# Altium PCB Export_PCB.PcbDoc (part 1 of 7)
Units mm, origin at the board's own origin, x right, y up, seen from the top; angles counter-clockwise.
Board outline 93 x 90 mm, 6 copper layers (Top_1, GND_2, SIGNAL_3, PWR_4, GND_5, Bottom_6), stack 1.606 mm thick; 470 components, 374 nets, 2145 pads, 1031 vias.
Unrouted connection lines stored in the file: 451.
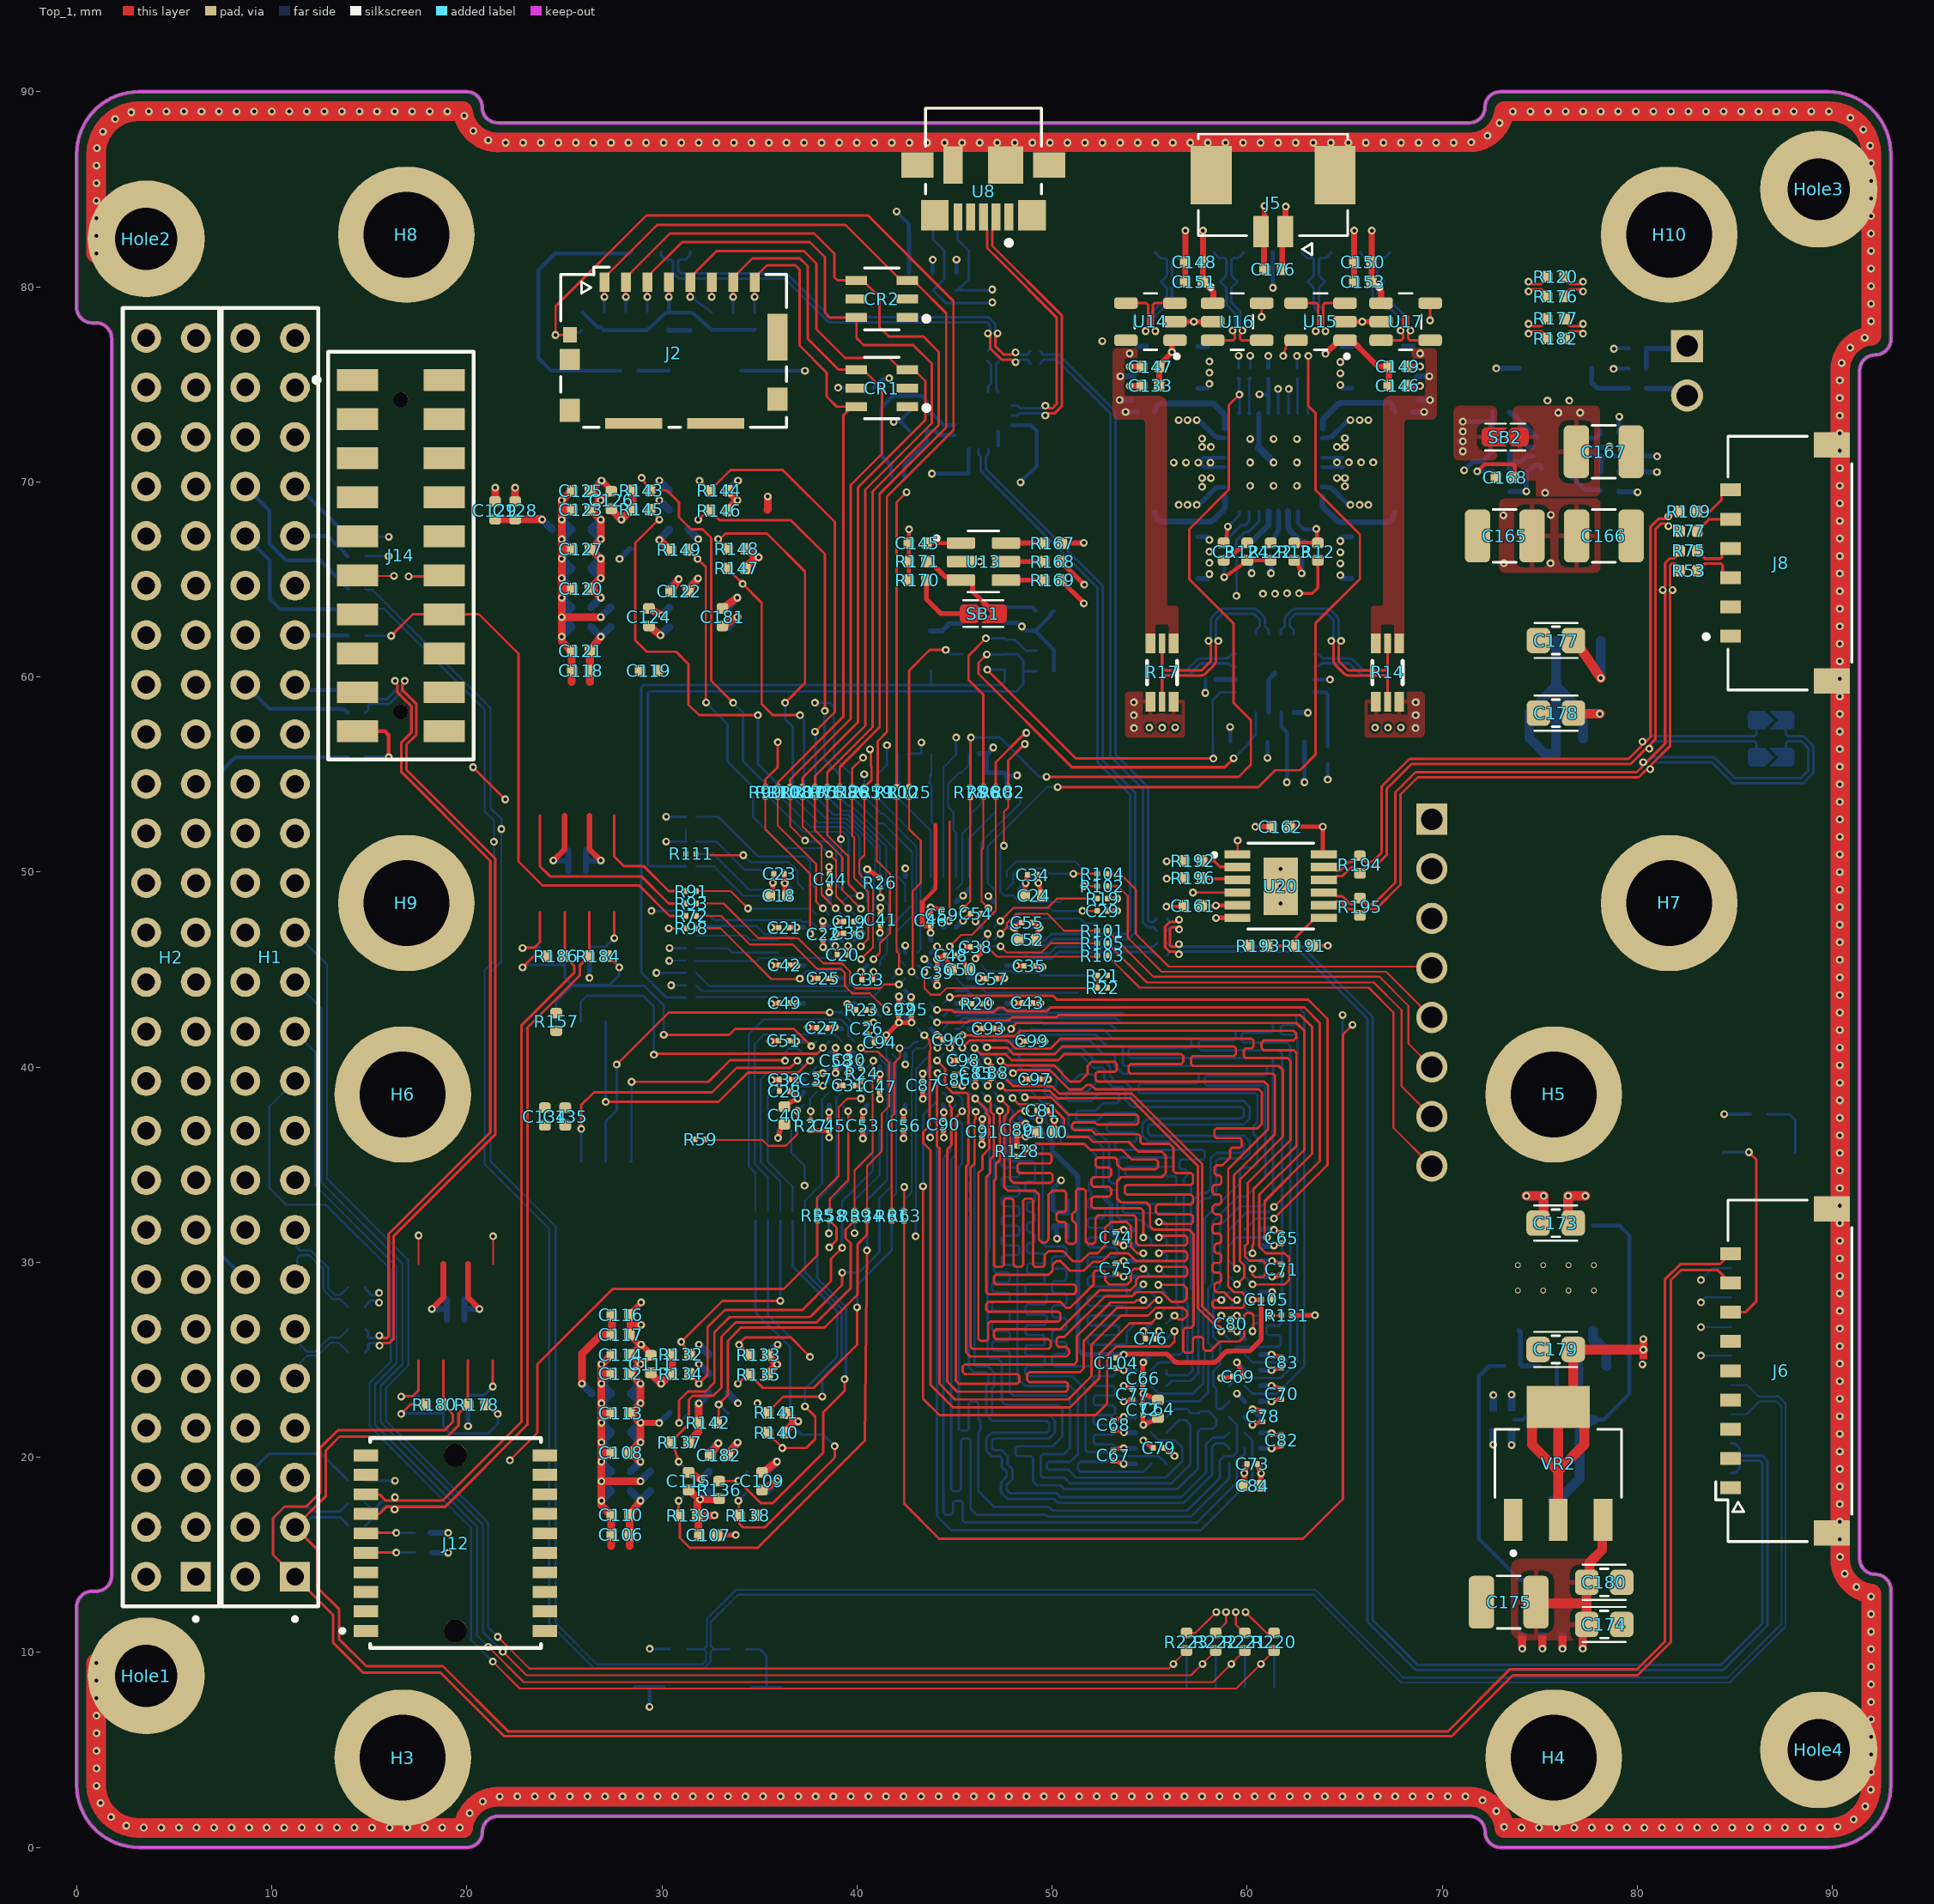
[diagram p0: Top_1 view]
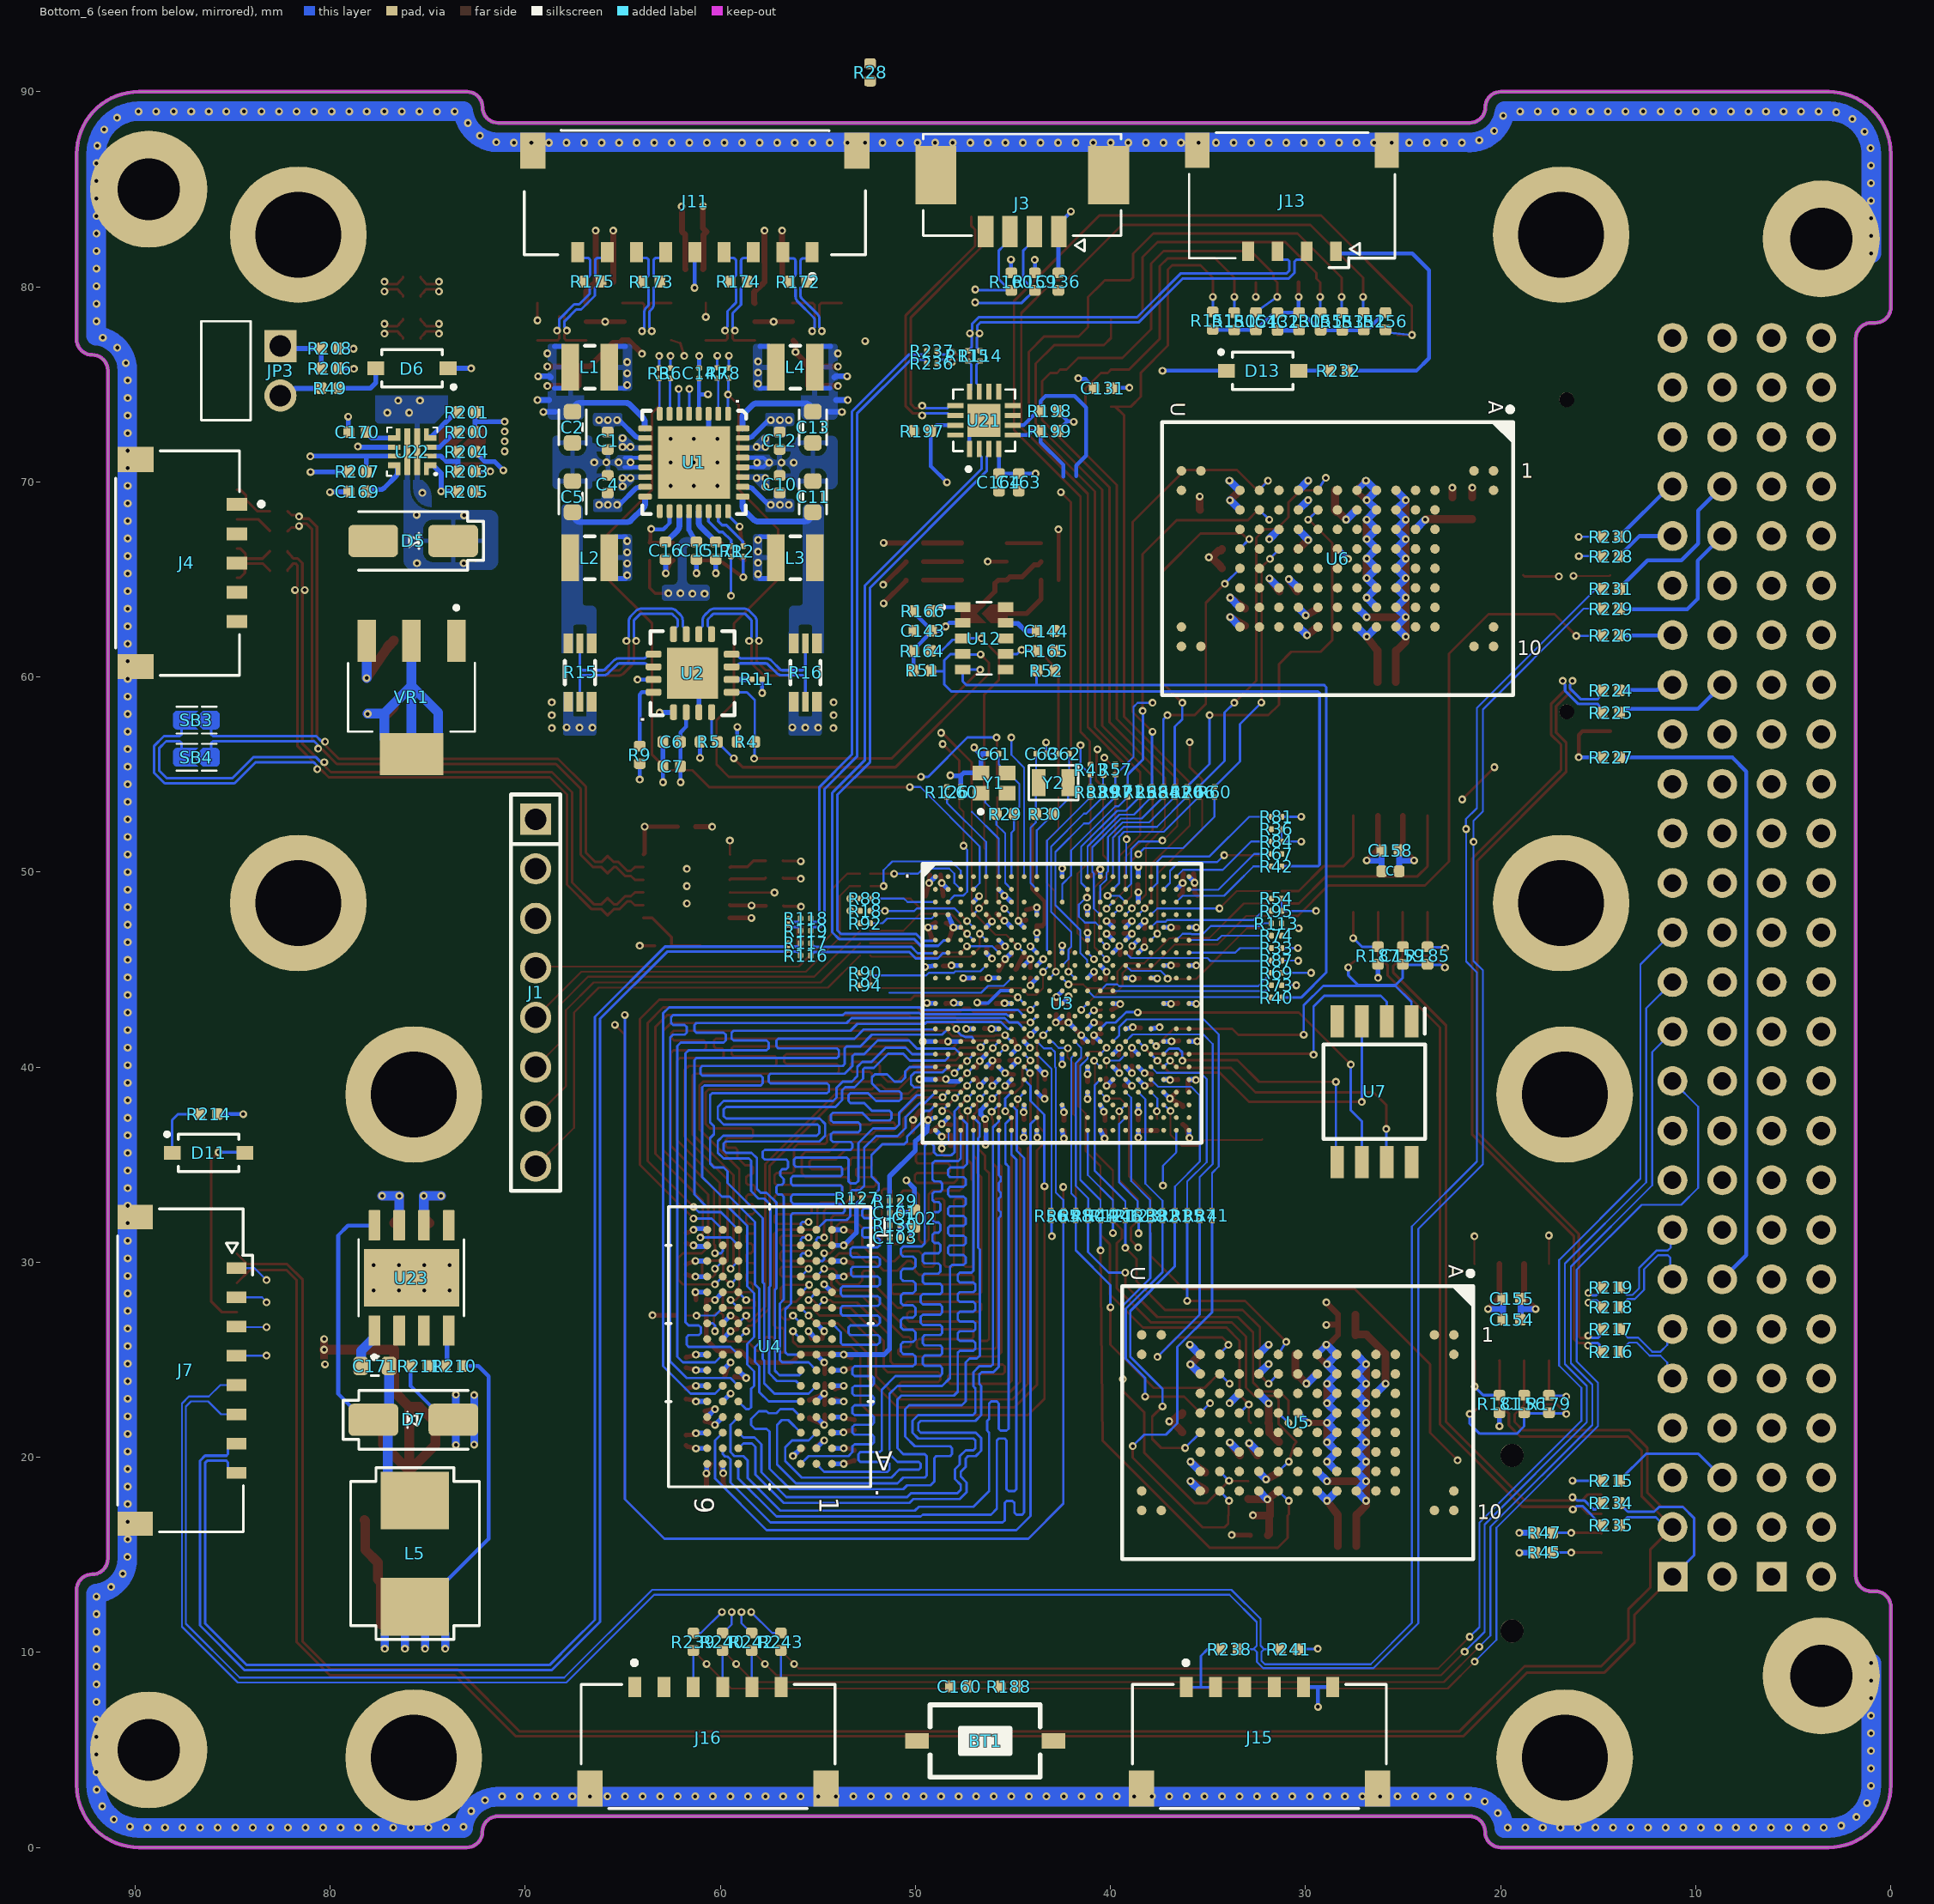
[diagram p1: Bottom_6 view, seen from below]
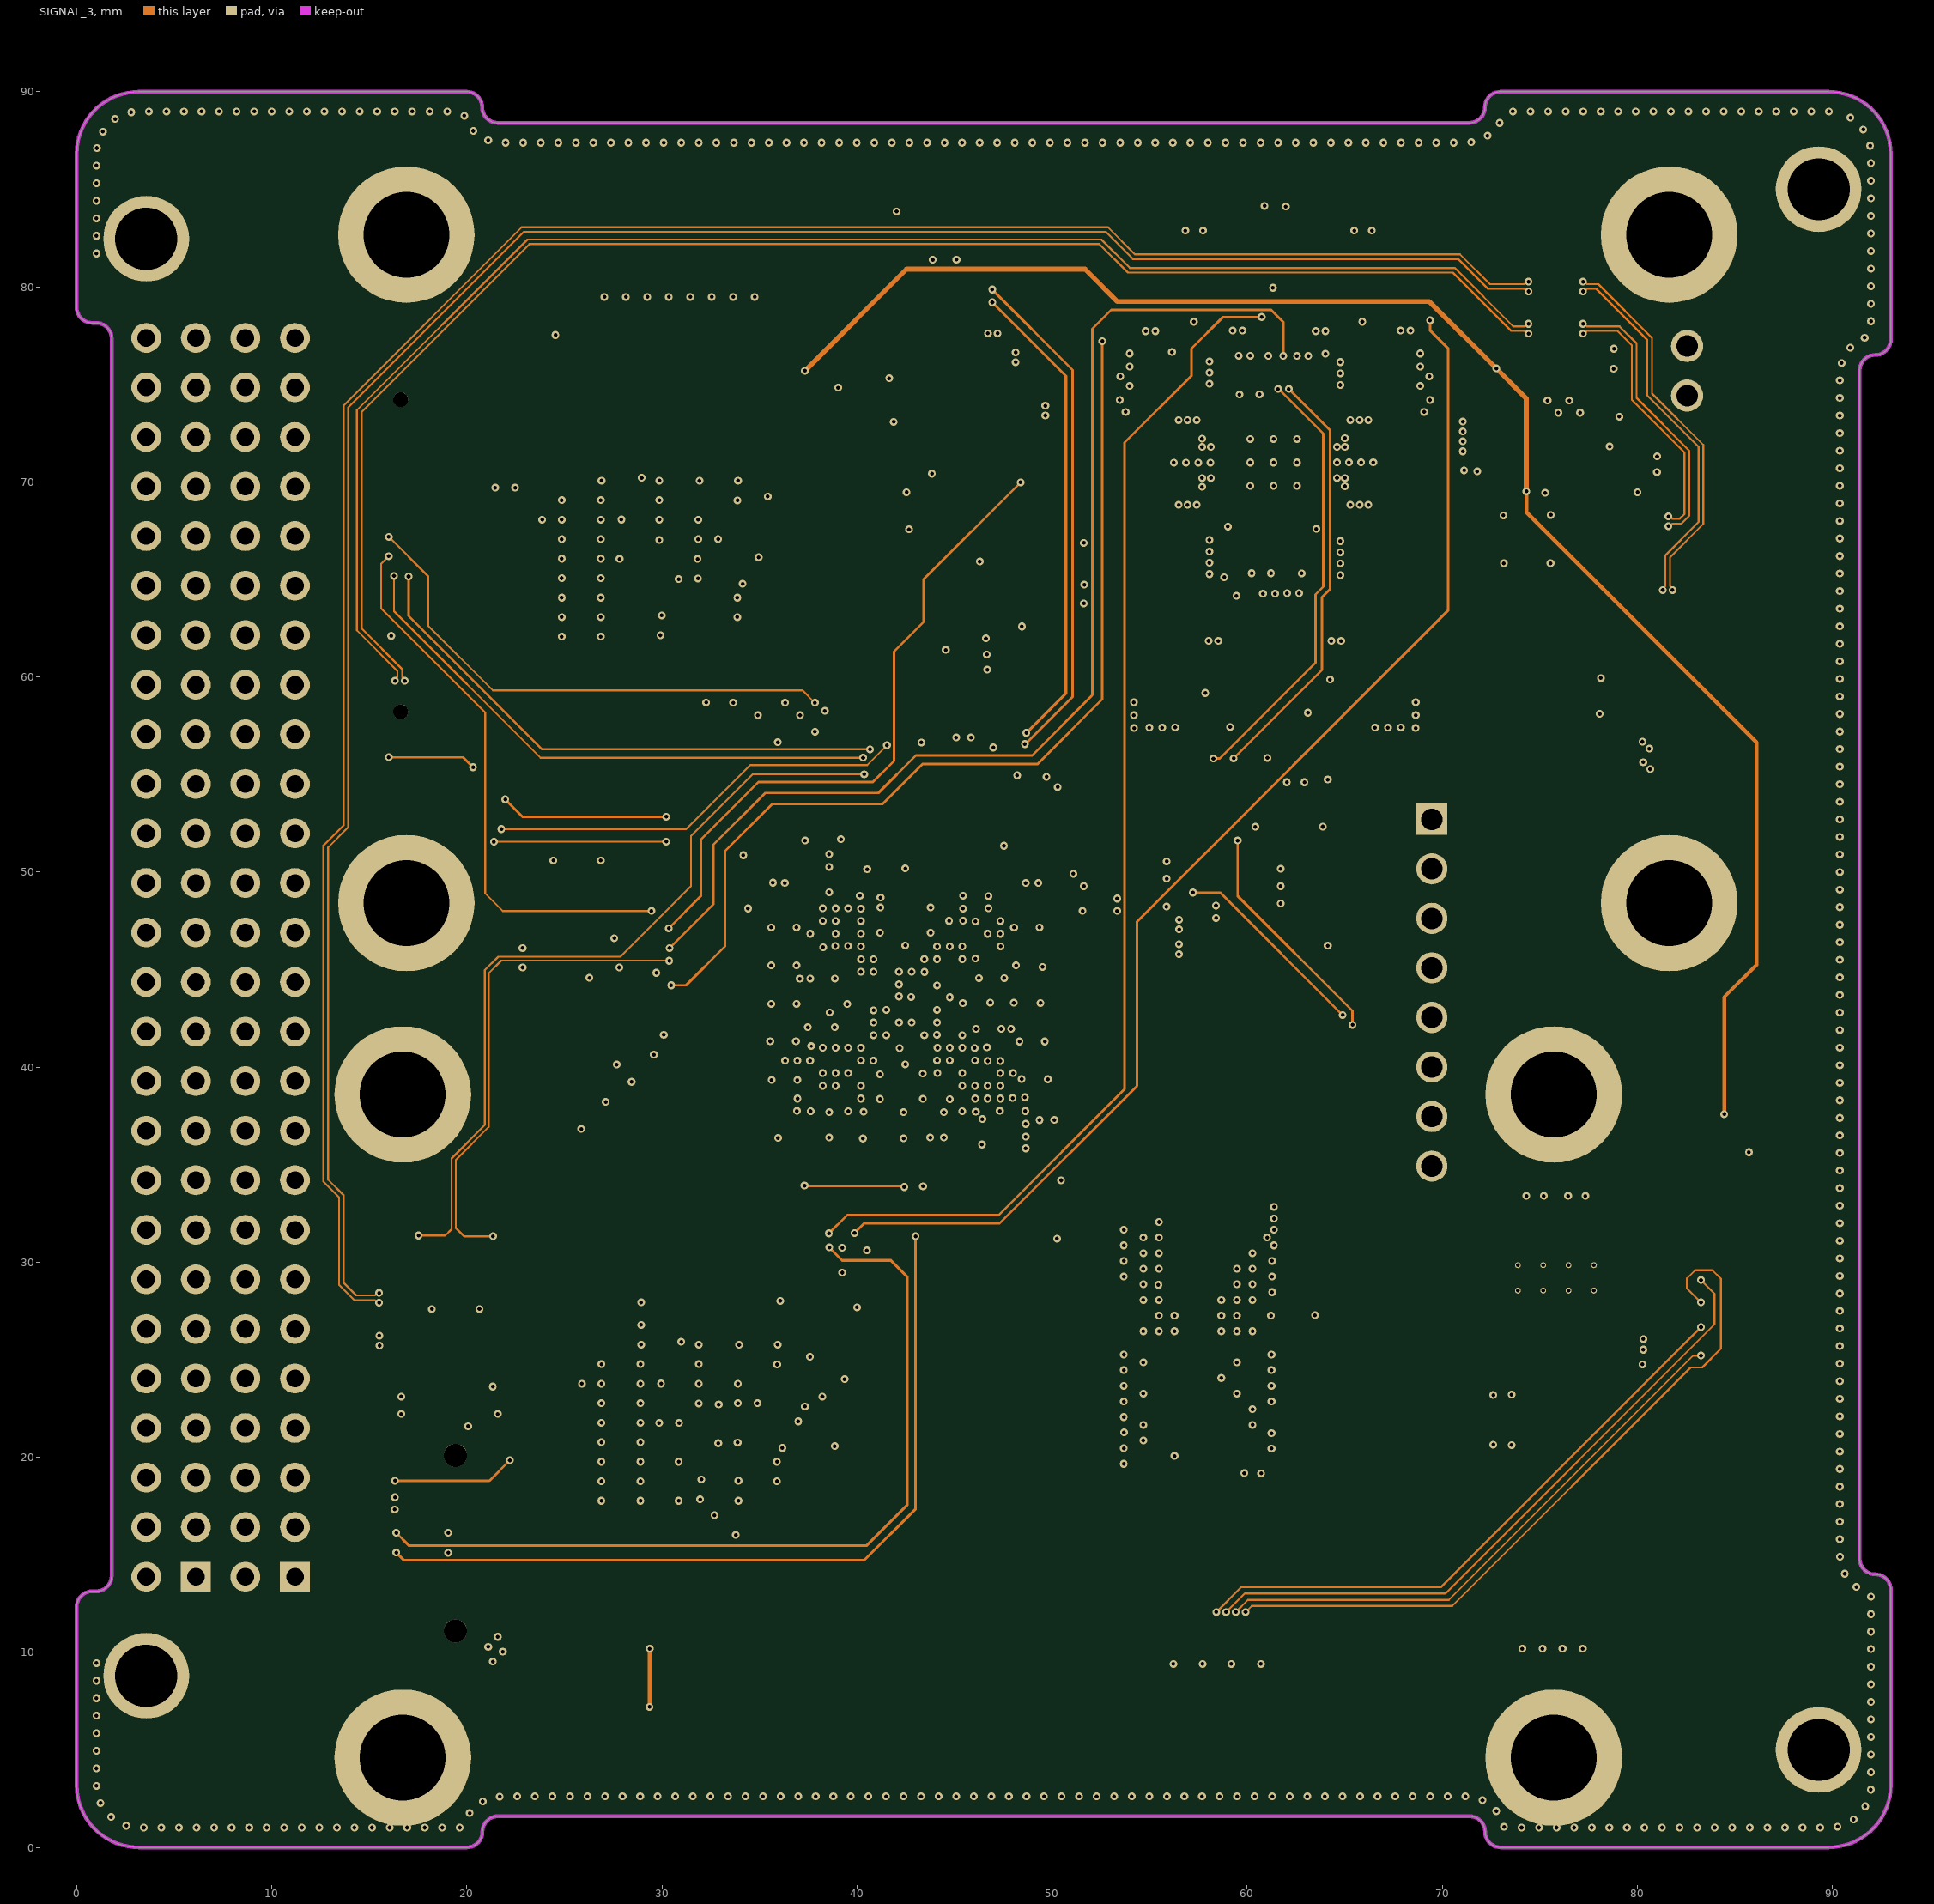
[diagram p2: SIGNAL_3]
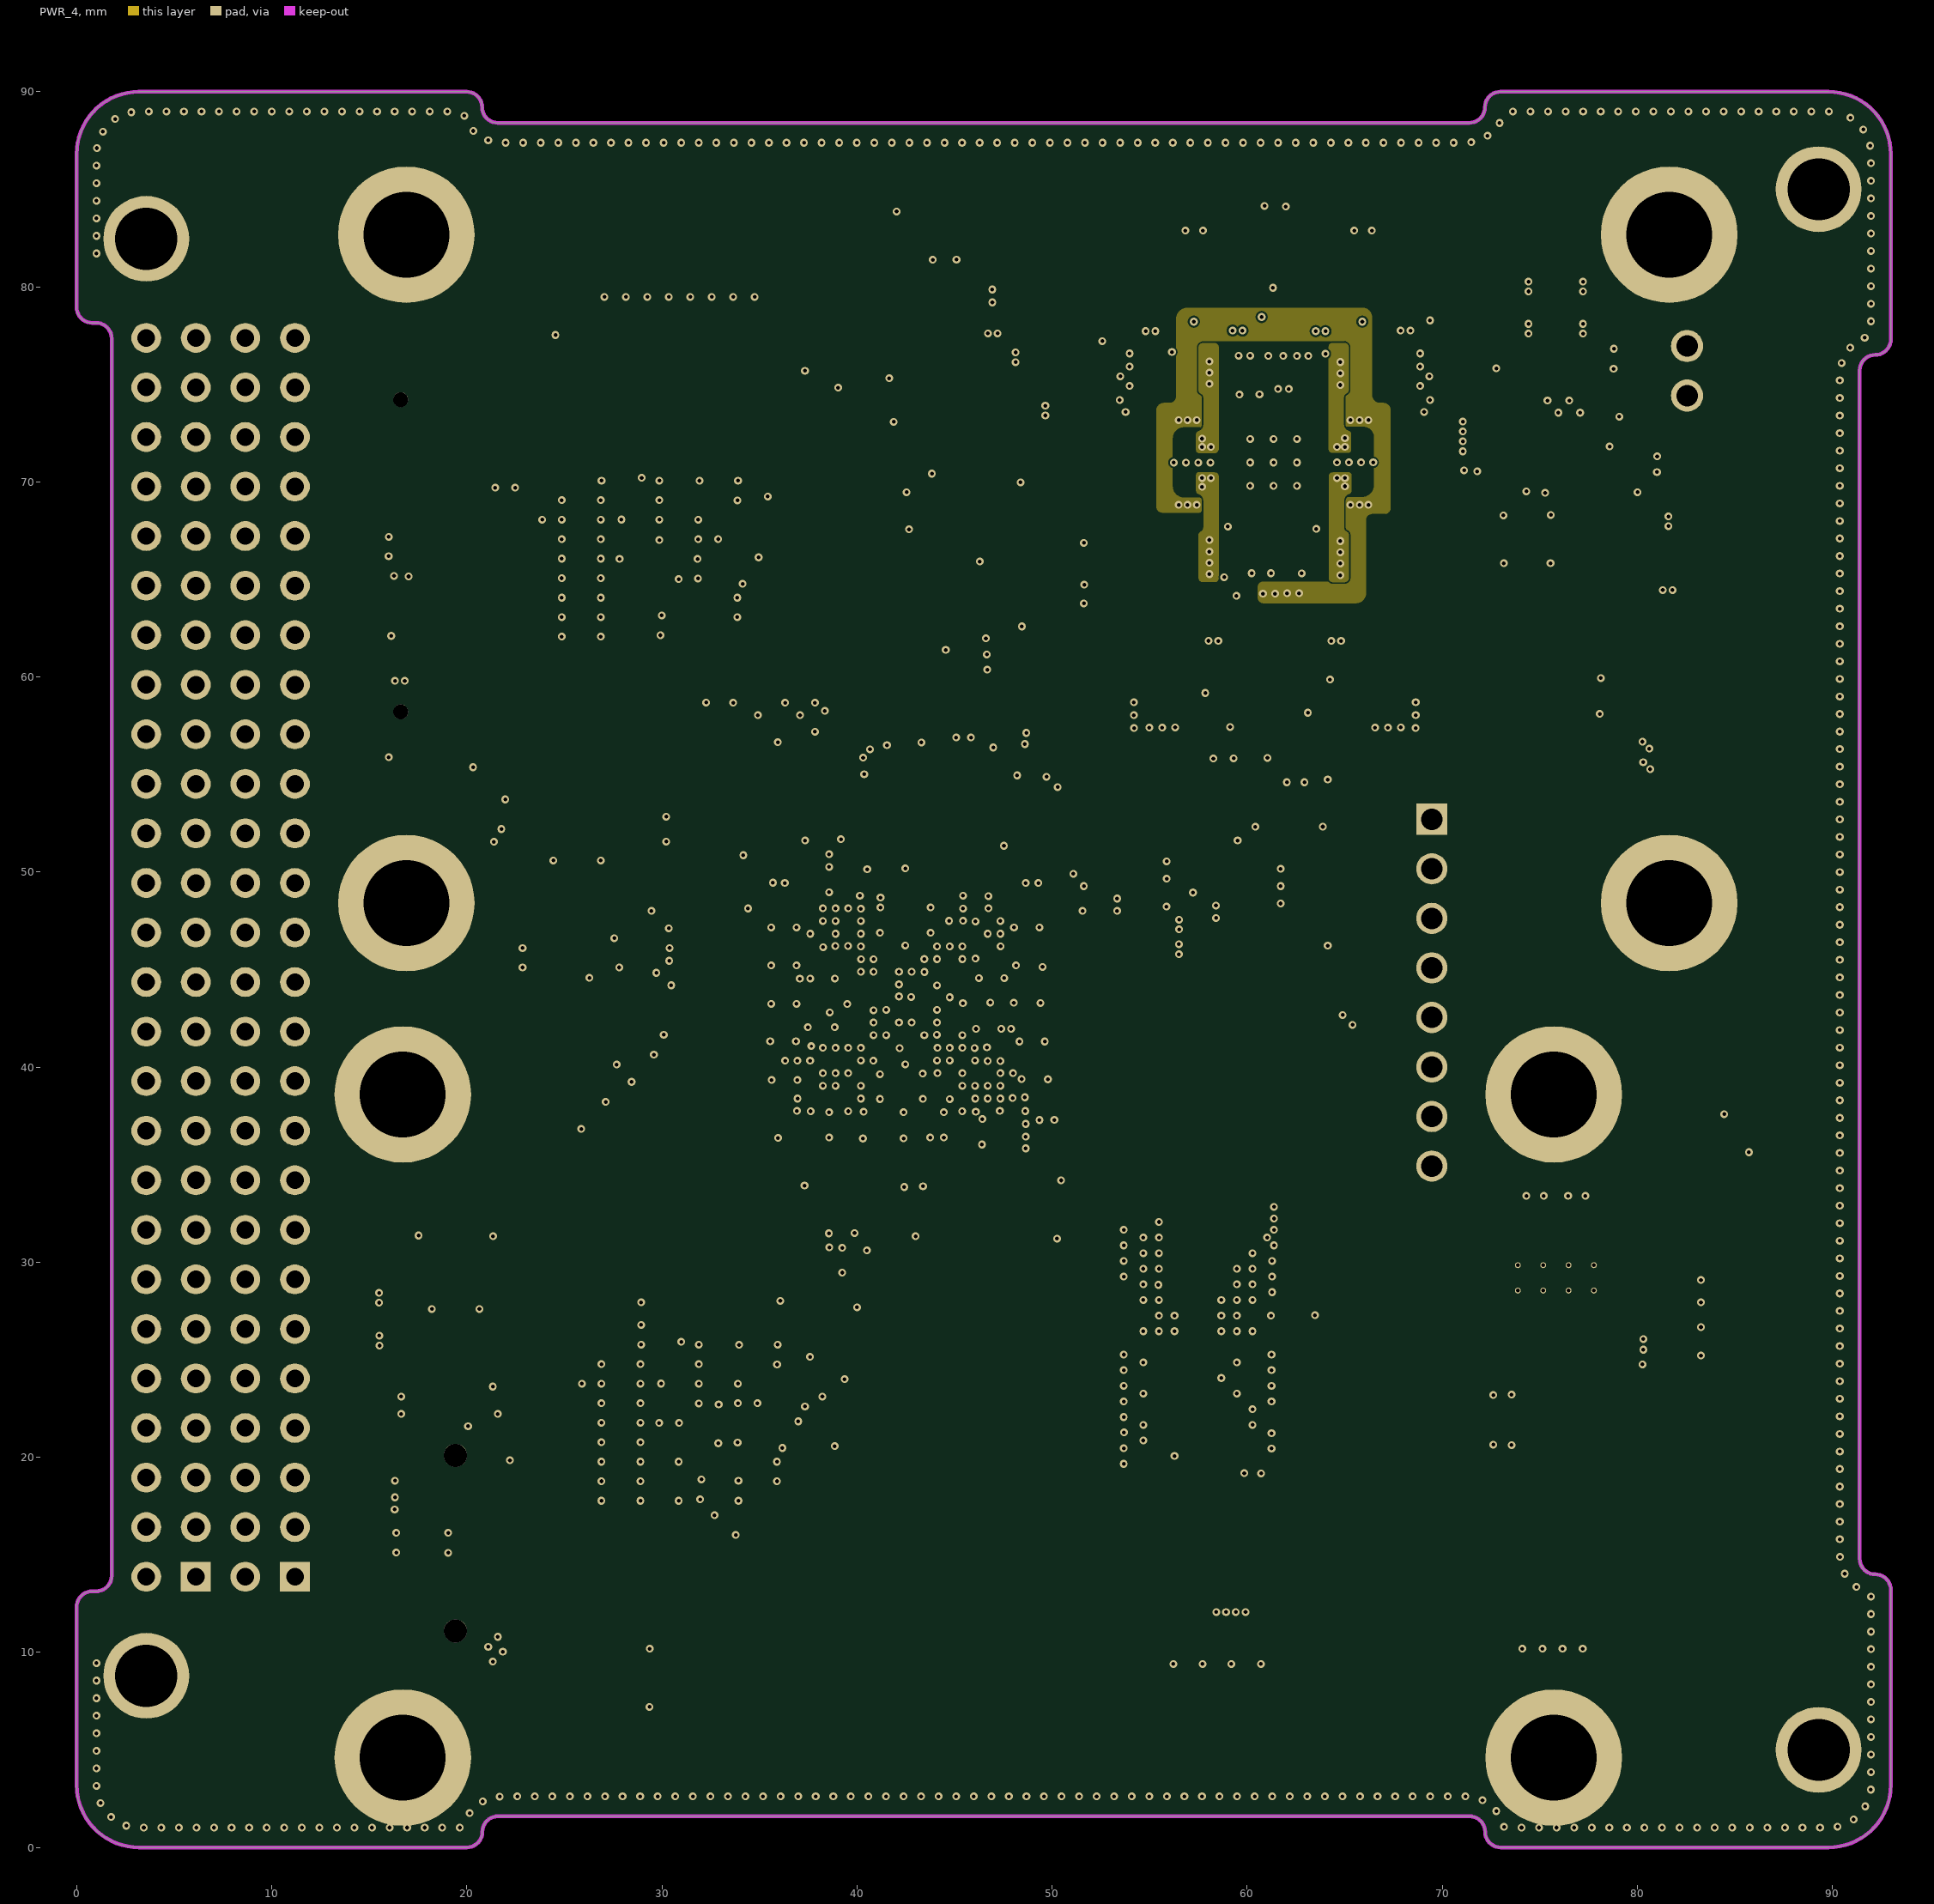
[diagram p3: PWR_4]
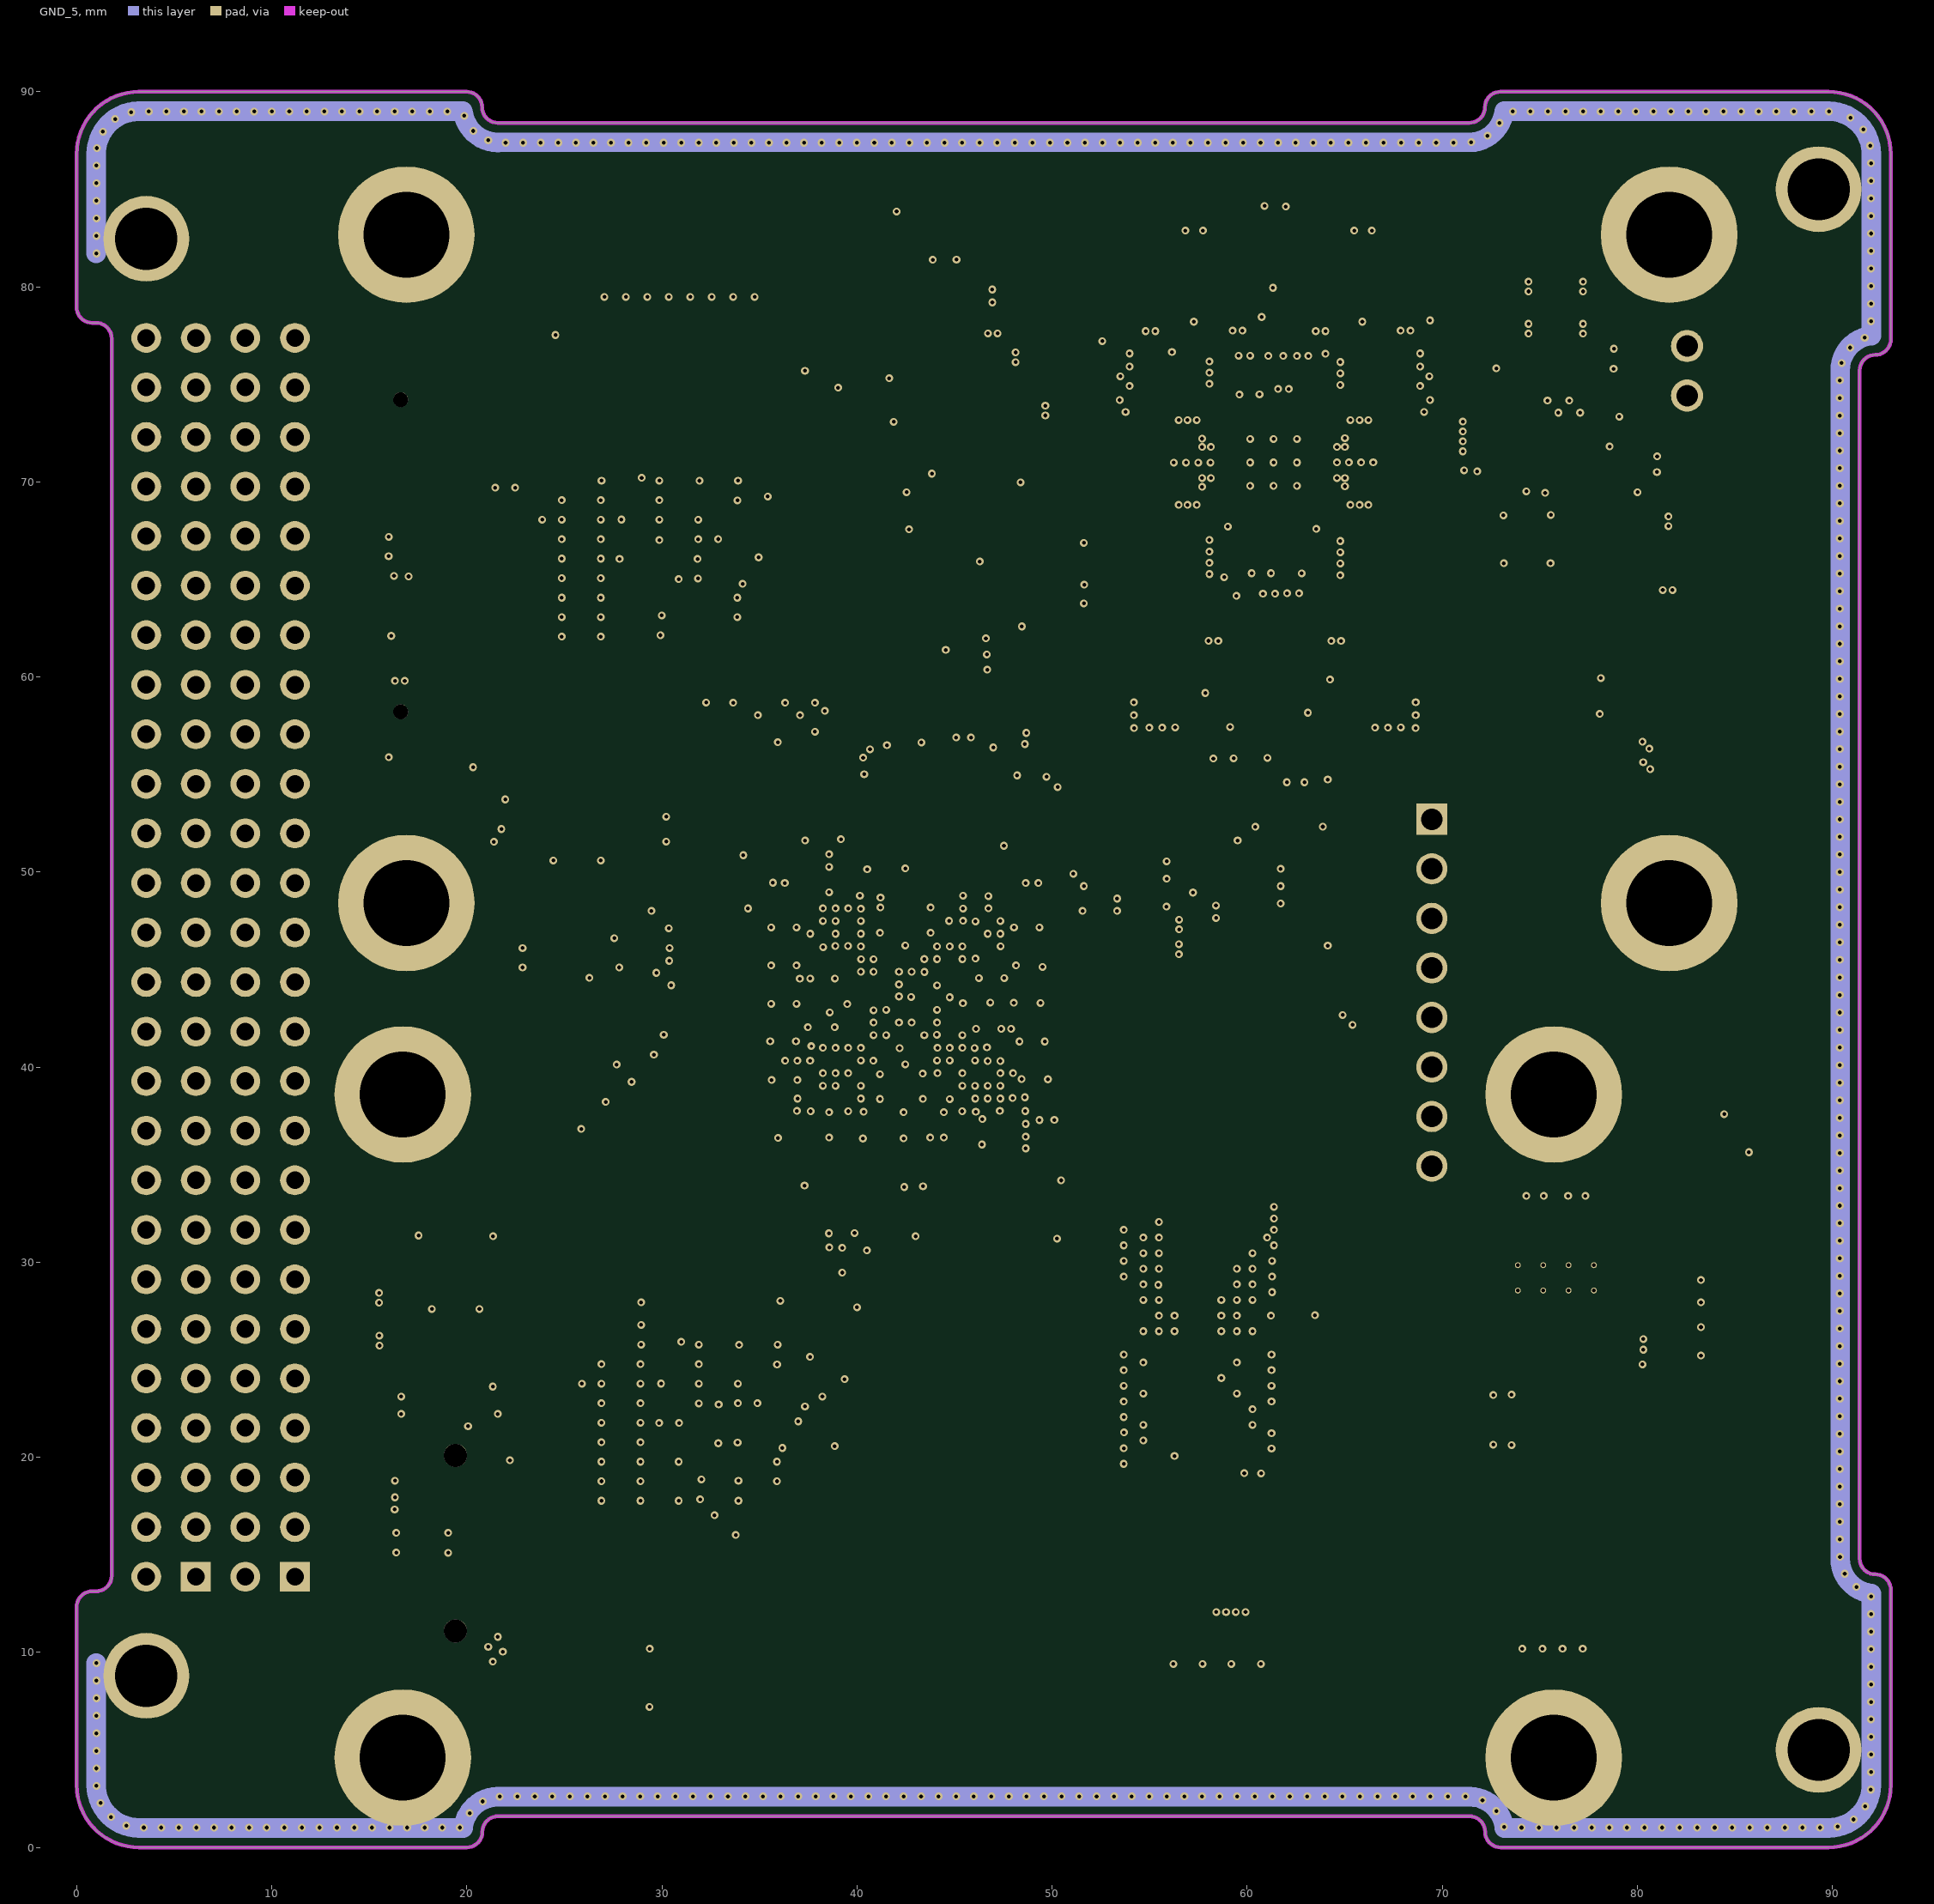
[diagram p4: GND_5]
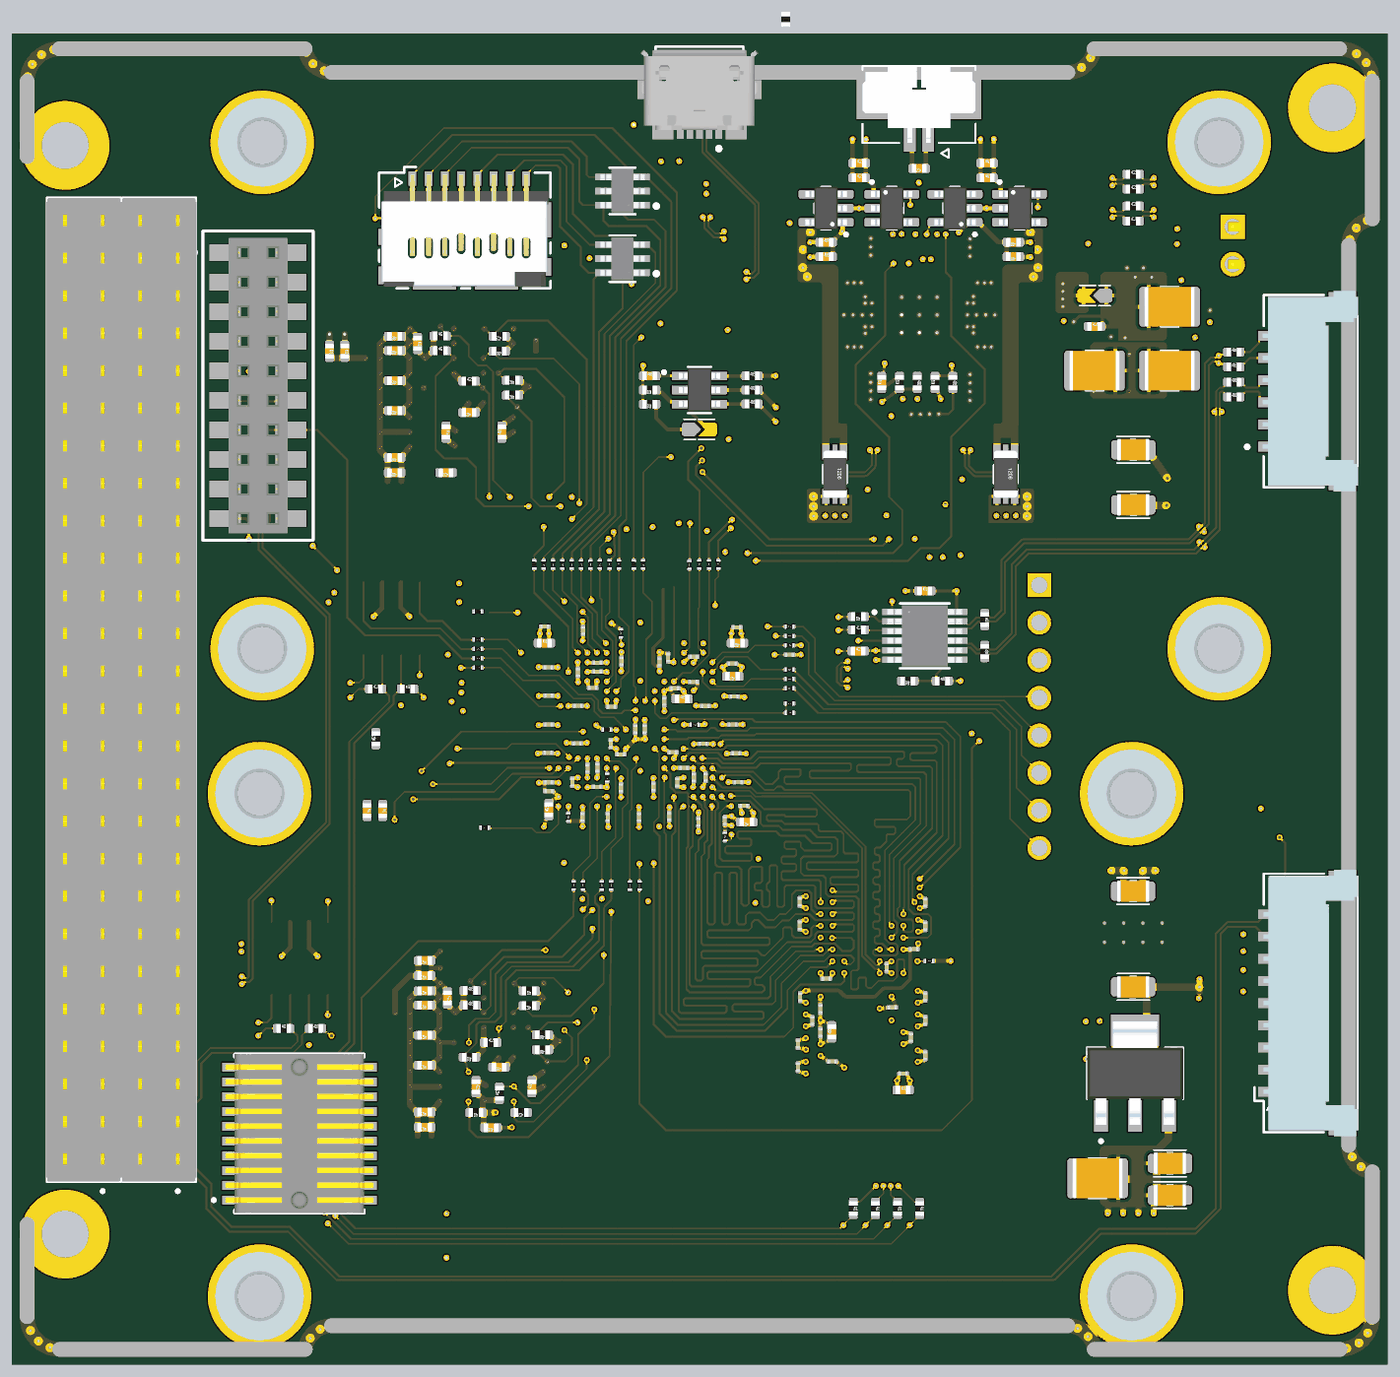
[diagram p10: 3D render of the assembled board from above, using the file's embedded part models]
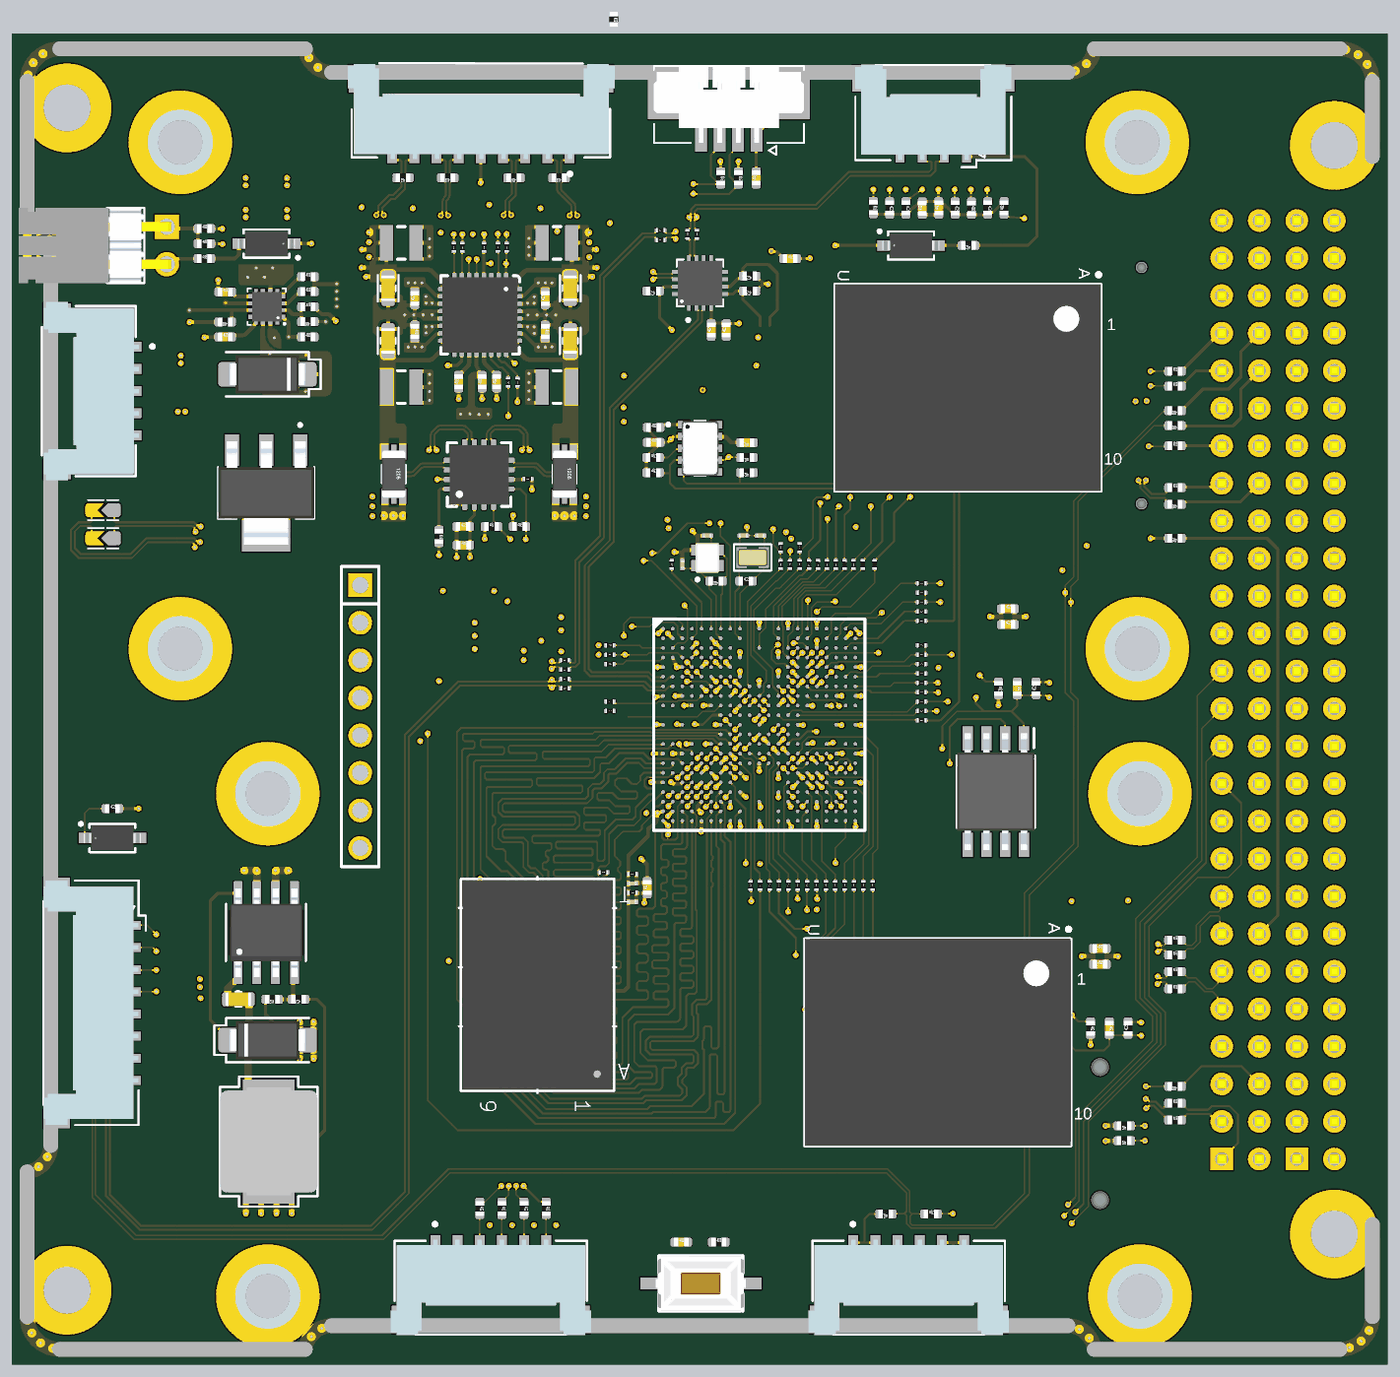
[diagram p11: 3D render of the assembled board from below, using the file's embedded part models]

## Layer stack, top to bottom
Top Solder: solder mask 0.012, Solder Resist, Dk 4.3
Top_1: signal copper 0.018
Dielectric 1: prepreg 0.09, PP-006, Dk 4.5
GND_2: signal copper 0.035
Dielectric 2: core 0.11, PP-006, Dk 4.1
SIGNAL_3: signal copper 0.035
Dielectric 3: dielectric 0.94, FR-4, Dk 4.2
PWR_4: signal copper 0.035
Dielectric 4: core 0.2, PP-006, Dk 4.1
GND_5: signal copper 0.035
Dielectric 5: prepreg 0.09, PP-006, Dk 4.5
Bottom_6: signal copper 0.018
Bottom Solder: solder mask 0.012, Solder Resist, Dk 4.3

## Board outline
0,12.33 cw(c0.8,12.33) 0.8,13.13 1,13.13 ccw(c1,13.93) 1.8,13.93 1.8,77.35 ccw(c1,77.35) 1,78.15 0.8,78.15 cw(c0.8,78.95) 0,78.95 0,86.8 cw(c3.2,86.8) 3.193,90 3.175,90 19.989,90 cw(c19.989,89.2) 20.789,89.2 ccw(c21.589,89.2) 21.589,88.4 21.59,88.399 42.015,88.4 71.399,88.4 71.389,88.4 ccw(c71.389,89.2) 72.189,89.2 cw(c72.989,89.2) 72.989,90 89.789,90 89.807,90 cw(c89.8,86.8) 93,86.807 93,77.307 cw(c92.2,77.307) 92.2,76.507 ccw(c92.2,75.707) 91.4,75.707 91.4,14.8 ccw(c92.2,14.8) 92.2,14 cw(c92.2,13.2) 93,13.2 93,3.2 cw(c89.8,3.2) 89.8,0 73,0 cw(c73,0.8) 72.2,0.8 ccw(c71.4,0.8) 71.4,1.6 71.399,1.6 50.975,1.6 21.59,1.6 21.6,1.6 ccw(c21.6,0.8) 20.8,0.8 cw(c20,0.8) 20,0 3.2,0 cw(c3.2,3.2) 0,3.2

## Design rules (kind name [scope] priority, off if disabled: settings)
Clearance Clearance_BGA [WithinRoom('ROOM_SAMA7')] p1: gap=0.101 ignorepadtopadclearanceinfootprint=FALSE
Clearance [All] p2: gap=0.1 ignorepadtopadclearanceinfootprint=TRUE
DiffPairsRouting DiffPairsRouting_Diff100 [InDifferentialPairClass('DIFF100')] p1: maxlimit=0.2 minlimit=0.127 mostfreqgap=0.2 toplayer_maxgap=0.127 toplayer_prefgap=0.127 toplayer_minwidth=0.105 toplayer_maxwidth=0.105 toplayer_prefwidth=0.105 midlayer3_mingap=0.2 midlayer3_minwidth=0.1 midlayer3_maxwidth=0.1 midlayer3_prefwidth=0.1 bottomlayer_maxgap=0.127 bottomlayer_prefgap=0.127 bottomlayer_minwidth=0.105 bottomlayer_maxwidth=0.105 bottomlayer_prefwidth=0.105 impedanceprofiledriven=TRUE impedanceprofileid={A7C629CD-4A0D-4397-8A47-8BC4FB27C845} impedanceprofilevalue=100.000000 maxuncoupledlength=12.7
DiffPairsRouting DiffPairsRouting_Diff90 [InDifferentialPairClass('DIFF90')] p2: maxlimit=0.14 minlimit=0.127 mostfreqgap=0.14 toplayer_maxgap=0.127 toplayer_prefgap=0.127 toplayer_minwidth=0.134 toplayer_maxwidth=0.134 toplayer_prefwidth=0.134 midlayer3_mingap=0.14 midlayer3_minwidth=0.1 midlayer3_maxwidth=0.1 midlayer3_prefwidth=0.1 bottomlayer_maxgap=0.127 bottomlayer_prefgap=0.127 bottomlayer_minwidth=0.134 bottomlayer_maxwidth=0.134 bottomlayer_prefwidth=0.134 impedanceprofiledriven=TRUE impedanceprofileid={21C5AD5F-6D0B-4350-B164-04A9B00691EE} impedanceprofilevalue=90.000000 maxuncoupledlength=12.7
MatchedLengths "Schematic Matched Net Lengths_6" [InNetClass('DIFF90')] p1: tolerance=0.102 checknetsindiffpair=TRUE checkdiffpairvsdiffpair=FALSE checkxsignals=FALSE checkothers=FALSE
MatchedLengths "Schematic Matched Net Lengths_5" [InNetClass('DDR-ADDR-CTL')] p2: tolerance=0.254 checknetsindiffpair=FALSE checkdiffpairvsdiffpair=TRUE checkxsignals=TRUE checkothers=TRUE
MatchedLengths "Schematic Matched Net Lengths_4" [InNetClass('DDR-LANE1')] p3: tolerance=0.254 checknetsindiffpair=FALSE checkdiffpairvsdiffpair=TRUE checkxsignals=TRUE checkothers=TRUE
MatchedLengths "Schematic Matched Net Lengths_3" [InNetClass('DDR-LANE0')] p4: tolerance=0.254 checknetsindiffpair=FALSE checkdiffpairvsdiffpair=TRUE checkxsignals=TRUE checkothers=TRUE
MatchedLengths "Schematic Matched Net Lengths_1" [InNetClass('DIFF100')] p5: tolerance=0.102 checknetsindiffpair=TRUE checkdiffpairvsdiffpair=FALSE checkxsignals=FALSE checkothers=FALSE
MatchedLengths "Schematic Matched Net Lengths" [InNetClass('JTAG')] p6: tolerance=2 checknetsindiffpair=FALSE checkdiffpairvsdiffpair=TRUE checkxsignals=TRUE checkothers=TRUE
PolygonConnect [All] p1: thpad.connectstyle=Relief thpad.reliefconductorwidth=0.254 thpad.reliefentries=4 thpad.polygonreliefangle="90 Angle" thpad.airgapwidth=0.254 smdpad.connectstyle=Relief smdpad.reliefconductorwidth=0.254 smdpad.reliefentries=4 smdpad.polygonreliefangle="90 Angle" smdpad.airgapwidth=0.254 via.connectstyle=Direct via.reliefconductorwidth=0.254 via.reliefentries=4 via.polygonreliefangle="90 Angle" via.airgapwidth=0.254
RoutingLayers [All] p1: top layer_v5=TRUE mid layer 2_v5=FALSE mid layer 3_v5=TRUE mid layer 4_v5=FALSE mid layer 5_v5=TRUE bottom layer_v5=TRUE
RoutingVias RoutingVias_BGA [WithinRoom('ROOM_SAMA7')] p1: holewidth=0.2 width=0.4 viastyle="Through Hole" minholewidth=0.2 minwidth=0.4 maxholewidth=0.2 maxwidth=0.4
RoutingVias [All] p2: holewidth=0.2 width=0.4 viastyle="Through Hole" minholewidth=0.2 minwidth=0.4 maxholewidth=0.5 maxwidth=1
SolderMaskExpansion [All] p1: expansion=0.102 istentingtop=FALSE
Width Width_Sing50 [InNetClass('QSPI') or InNetClass('50_eMMC1') or InNetClass('50_eMMC2') or InNetClass('DDR-ADDR-CTL') or InNetClass('DDR-LANE0') or InNetClass('DDR-LANE1')] p1: maxlimit=0.364 minlimit=0.125 preferedwidth=0.364 toplayer_maxwidth=0.125 toplayer_prefwidth=0.125 midlayer3_minwidth=0.135 midlayer3_maxwidth=0.135 midlayer3_prefwidth=0.135 bottomlayer_maxwidth=0.125 bottomlayer_prefwidth=0.125 impedanceprofiledriven=TRUE impedanceprofileid={9F8C7077-2CC5-4DDA-BF69-C97E8495018D} impedanceprofilevalue=50.000000 minimp=50.000000 maximp=50.000000 favimp=50.000000
Width [All] p2: maxlimit=1 minlimit=0.1 preferedwidth=0.254
28 further rules are at their usual default settings.

## Classes and differential pairs
differential pair class DIFF100: DDR_CK DDR_DQS0 DDR_DQS1
differential pair class DIFF90: EXP_2_CONN_USB EXP_2_IF_USB EXP_USB IF_2_SW_USB IF_USB_CONN LVDS_RXC LVDS_RXD LVDS_TXC LVDS_TXD RS_422_2_PC104_RX RS_422_2_PC104_TX RS_422_RX RS_422_TX SENSE1 SENSE2 SENSE3 SENSE4 SW_2_CONN_USB USB_DEBUG USBA
net class QSPI: MRAM_QSPI_CLK MRAM_QSPI_CS MRAM_QSPI_D0 MRAM_QSPI_D1 MRAM_QSPI_D2 MRAM_QSPI_D3
net class JTAG: JTAG_NTRST_PC22 JTAG_TCK_PC23 JTAG_TDI_PC25 JTAG_TDO_PC26 JTAG_TMS_PC24
net class DIFF100: DDR_CK_N DDR_CK_P DDR_DQS0_N DDR_DQS0_P DDR_DQS1_N DDR_DQS1_P
net class DIFF90: EXP_2_CONN_USB_N EXP_2_CONN_USB_P EXP_2_IF_USB_N EXP_2_IF_USB_P EXP_USB_N EXP_USB_P IF_2_SW_USB_N IF_2_SW_USB_P IF_USB_CONN_N IF_USB_CONN_P LVDS_RXC_N LVDS_RXC_P LVDS_RXD_N LVDS_RXD_P LVDS_TXC_N LVDS_TXC_P LVDS_TXD_N LVDS_TXD_P RS_422_2_PC104_RX_N RS_422_2_PC104_RX_P RS_422_2_PC104_TX_N RS_422_2_PC104_TX_P RS_422_RX_N RS_422_RX_P RS_422_TX_N RS_422_TX_P SENSE1_N SENSE1_P SENSE2_N SENSE2_P SENSE3_N SENSE3_P SENSE4_N SENSE4_P SW_2_CONN_USB_N SW_2_CONN_USB_P USB_DEBUG_N USB_DEBUG_P
net class DDR-LANE1: DDR_D8 DDR_D9 DDR_D10 DDR_D11 DDR_D12 DDR_D13 DDR_D14 DDR_D15 DDR_DQM1 DDR_DQS1_N DDR_DQS1_P
net class DDR-LANE0: DDR_D0 DDR_D1 DDR_D2 DDR_D3 DDR_D4 DDR_D5 DDR_D6 DDR_D7 DDR_DQM0 DDR_DQS0_N DDR_DQS0_P
net class DDR-ADDR-CTL: DDR_A0 DDR_A1 DDR_A2 DDR_A3 DDR_A4 DDR_A5 DDR_A6 DDR_A7 DDR_A8 DDR_A9 DDR_A10 DDR_A11 DDR_A12 DDR_A13 DDR_A14 DDR_A15 DDR_BA0 DDR_BA1 DDR_BA2 DDR_CAS DDR_CK_N DDR_CK_P DDR_CKE DDR_CS DDR_ODT DDR_RAS DDR_WE
net class 50_eMMC2: SDMMC1_CLK SDMMC1_CMD SDMMC1_D0 SDMMC1_D1 SDMMC1_D2 SDMMC1_D3
net class 50_eMMC1: SDMMC0_CLK SDMMC0_CMD SDMMC0_D0 SDMMC0_D1 SDMMC0_D2 SDMMC0_D3 SDMMC0_D4 SDMMC0_D5 SDMMC0_D6 SDMMC0_D7
component class WATCHDOG: C145 R167 R168 R169 R170 R171 SB1 U13
component class USB_SWITCH: C163 C164 R197 R198 R199 U21
component class SDCARD: C130 C131 C132 CR1 CR2 J2 R150 R151 R152 R153 R154 R155 R156
component class SAMA7D65_PMIC: C1 C2 C3 C4 C5 C6 C7 C10 C11 C12 C13 C14 C15 C16 C17 L1 L2 L3 L4 R1 R2 R3 R4 R5 R6 R7 R8 R9 R11 R12 R13 R14 R15 R16 R17 U1 U2
component class SAMA7D65_PIO: J1 R31 R32 R33 R34 R35 R36 R37 R38 R39 R40 R41 R42 R43 R44 R46 R48 R50 R54 R55 R56 R57 R58 R59 R60 R61 R62 R63 R64 R65 R66 R67 R68 R69 R70 R71 R72 R73 R74 R76 R78 R79 R80 R81 R82 R83 R84 R85 R86 R87 R88 R89 R90 R91 R92 R93 R94 R95 R96 R97 R98 R99 R100 R101 R102 R103 R104 R105 R106 R107 R108 R110 R111 R112 R113 R121 R122 R123 R124 R125 R126 U3
component class SAMA7D65_MPU: C18 C19 C20 C21 C22 C23 C24 C25 C26 C27 C28 C29 C30 C31 C32 C33 C34 C35 C36 C37 C38 C39 C40 C41 C42 C43 C44 C45 C46 C47 C48 C49 C50 C51 C52 C53 C54 C55 C56 C57 C58 C59 C60 C61 C62 C63 R18 R19 R20 R21 R22 R23 R24 R25 R26 R27 R28 R29 R30 tc Y1 Y2
component class SAMA7D65_DDR3L: C64 C65 C66 C67 C68 C69 C70 C71 C72 C73 C74 C75 C76 C77 C78 C79 C80 C81 C82 C83 C84 C85 C86 C87 C88 C89 C90 C91 C92 C93 C94 C95 C96 C97 C98 C99 C100 C101 C102 C103 C104 C105 R127 R128 R129 R130 R131 U4
component class RTC: C143 C144 R51 R52 R164 R165 R166 U12
component class RS422: C161 C162 R191 R192 R193 R194 R195 R196 SB3 SB4 U20
component class POWER: C165 C166 C167 C168 C169 C170 C171 C173 C174 C175 C176 C177 C178 C179 C180 D5 D6 D7 J4 J5 JP3 L5 R49 R200 R201 R203 R204 R205 R206 R207 R208 R210 R211 SB2 U22 U23 VR1 VR2
component class MOUNTING_HOLE: H3 H4 H5 H6 H7 H8 H9 H10 Hole1 Hole2 Hole3 Hole4
component class LVDS: C133 C146 C147 C148 C149 C150 C151 C153 R172 R173 R174 R175 U14 U15 U16 U17
component class eMMC: C106 C107 C108 C109 C110 C111 C112 C113 C114 C115 C116 C117 C118 C119 C120 C121 C122 C123 C124 C125 C126 C127 C128 C129 C181 C182 R132 R133 R134 R135 R136 R137 R138 R139 R140 R141 R142 R143 R144 R145 R146 R147 R148 R149 U5 U6
component class EEPROM: C134 C135 R157 U7
component class DEBUG_CONSOLE: C136 J3 R159 R160 U8
component class CONNECTOR_INTERFACE: D13 H1 H2 J8 J11 J12 J13 J14 J15 J16 R45 R47 R53 R75 R77 R109 R114 R115 R120 R176 R177 R182 R215 R216 R217 R218 R219 R220 R221 R222 R223 R224 R225 R226 R227 R228 R229 R230 R231 R232 R234 R235 R236 R237 R238 R239 R240 R241 R242 R243 tc
component class CONNECTOR_EXP: D11 J6 J7 R116 R117 R118 R119 R214
component class CAN_PHY: c C154 C155 C156 C158 C159 R178 R179 R180 R181 R184 R185 R186 R187
component class BUTTON_LED: BT1 C160 R188
differential pair RS_422_2_PC104_TX: +RS_422_2_PC104_TX_P -RS_422_2_PC104_TX_N
differential pair RS_422_2_PC104_RX: +RS_422_2_PC104_RX_P -RS_422_2_PC104_RX_N
differential pair SW_2_CONN_USB: +SW_2_CONN_USB_P -SW_2_CONN_USB_N
differential pair EXP_2_CONN_USB: +EXP_2_CONN_USB_P -EXP_2_CONN_USB_N
differential pair IF_2_SW_USB: +IF_2_SW_USB_P -IF_2_SW_USB_N
differential pair EXP_2_IF_USB: +EXP_2_IF_USB_P -EXP_2_IF_USB_N
differential pair IF_USB_CONN: +IF_USB_CONN_P -IF_USB_CONN_N
differential pair USB_DEBUG: +USB_DEBUG_P -USB_DEBUG_N
differential pair SENSE4: +SENSE4_P -SENSE4_N
differential pair SENSE3: +SENSE3_P -SENSE3_N
differential pair SENSE2: +SENSE2_P -SENSE2_N
differential pair SENSE1: +SENSE1_P -SENSE1_N
differential pair RS_422_TX: +RS_422_TX_P -RS_422_TX_N
differential pair RS_422_RX: +RS_422_RX_P -RS_422_RX_N
differential pair LVDS_TXD: +LVDS_TXD_P -LVDS_TXD_N
differential pair LVDS_TXC: +LVDS_TXC_P -LVDS_TXC_N
differential pair LVDS_RXD: +LVDS_RXD_P -LVDS_RXD_N
differential pair LVDS_RXC: +LVDS_RXC_P -LVDS_RXC_N
differential pair EXP_USB: +EXP_USB_P -EXP_USB_N
differential pair DDR_DQS1: +DDR_DQS1_P -DDR_DQS1_N
differential pair DDR_DQS0: +DDR_DQS0_P -DDR_DQS0_N
differential pair DDR_CK: +DDR_CK_P -DDR_CK_N

## Components (designator, comment, footprint, x,y, rotation, side; value= is the part's Value field where it differs from the comment)
BT1 "BT_" SW2-SMD 46.426,5.461 r0 bottom value="SW chip 2 pin"
c "0.1uF/10V" CAP_C_1005X50_L 25.654,50.038 r180 bottom (schematic designator C157)
C1 "4.7uF/10V" CAP_C_1005X50_L 65.775,72.111 r90 bottom
C2 "22uF/10V" CAP_C_1608X80 67.579,72.797 r270 bottom
C3 "1uF/20V" CAP_C_1005X50_L 58.801,66.421 r90 top
C4 "4.7uF/10V" CAP_C_1005X50_L 65.775,69.876 r270 bottom
C5 "22uF/10V" CAP_C_1608X80 67.579,69.241 r90 bottom
C6 "0.1uF/10V" CAP_C_1005X50_L 62.499,56.668 r180 bottom
C7 "4.7uF/10V" CAP_C_1005X50_L 62.489,55.423 r180 bottom
C10 "4.7uF/10V" CAP_C_1005X50_L 56.961,69.876 r270 bottom
C11 "22uF/10V" CAP_C_1608X80 55.26,69.241 r90 bottom
C12 "4.7uF/10V" CAP_C_1005X50_L 56.961,72.111 r90 bottom
C13 "22uF/10V" CAP_C_1608X80 55.26,72.797 r270 bottom
C14 "4.7uF/10V" RES_C_0603X30 61.087,75.565 r270 bottom
C15 "4.7uF/10V" CAP_C_1005X50_L 61.229,66.472 r90 bottom
C16 "4.7uF/10V" CAP_C_1005X50_L 62.811,66.472 r90 bottom
C17 "4.7uF/10V" CAP_C_1005X50_L 60.238,66.472 r90 bottom
C18 "4.7uF/10V" CAP_C_1005X50_L 35.993,48.789 r0 top
C19 "0.1uF/10V" CAP_C_0603x30 39.581,47.458 r180 top
C20 "0.1uF/10V" CAP_C_0603x30 39.256,45.758 r180 top
C21 "0.1uF/10V" CAP_C_0603x30 36.256,47.147 r0 top
C22 "0.1uF/10V" CAP_C_0603x30 38.256,46.808 r90 top
C23 "0.1uF/10V" CAP_C_0603x30 36.006,49.909 r0 top
C24 "4.7uF/10V" CAP_C_1005X50_L 49.055,48.789 r180 top
C25 "0.1uF/10V" CAP_C_0603x30 38.264,44.548 r0 top
C26 "0.1uF/10V" CAP_C_0603x30 40.481,41.983 r90 top
C27 "0.1uF/10V" CAP_C_0603x30 38.205,42.008 r0 top
C28 "0.1uF/10V" CAP_C_0603x30 36.288,38.766 r0 top
C29 "18pF/10V" CAP_C_0603x30 52.578,48.006 r0 top
C30 "0.1uF/10V" CAP_C_0603x30 39.581,40.358 r270 top
C31 "0.1uF/10V" CAP_C_0603x30 39.556,39.058 r180 top
C32 "0.1uF/10V" CAP_C_0603x30 36.277,39.362 r0 top
C33 "0.1uF/10V" CAP_C_0603x30 40.528,44.482 r0 top
C34 "0.1uF/10V" CAP_C_0603x30 49.006,49.858 r180 top
C35 "0.1uF/10V" CAP_C_0603x30 48.831,45.183 r180 top
C36 "0.1uF/10V" CAP_C_0603x30 39.581,46.858 r0 top
C37 "0.1uF/10V" CAP_C_0603x30 37.881,39.383 r270 top
C38 "0.1uF/10V" CAP_C_0603x30 46.081,46.158 r180 top
C39 "0.1uF/10V" CAP_C_0603x30 44.106,44.833 r270 top
C40 "4.7uF/10V" CAP_C_1005X50_L 36.288,37.518 r90 top
C41 "0.1uF/10V" CAP_C_0603x30 41.206,47.558 r270 top
C42 "0.1uF/10V" CAP_C_0603x30 36.281,45.233 r0 top
C43 "0.1uF/10V" CAP_C_0603x30 48.731,43.283 r180 top
C44 "0.1uF/10V" CAP_C_0603x30 38.606,49.633 r270 top
C45 "0.1uF/10V" CAP_C_0603x30 38.574,37.008 r90 top
C46 "0.1uF/10V" CAP_C_0603x30 43.783,47.507 r270 top
C47 "0.1uF/10V" CAP_C_0603x30 41.174,38.993 r90 top
C48 "0.1uF/10V" CAP_C_0603x30 44.81,45.727 r0 top
C49 "0.1uF/10V" CAP_C_0603x30 36.281,43.283 r0 top
C50 "4.7uF/10V" CAP_C_1005X50_L 45.306,45.008 r0 top
C51 "0.1uF/10V" CAP_C_0603x30 36.238,41.358 r0 top
C52 "2.2uF/10V" CAP_C_1005X50_L 48.731,46.533 r180 top
C53 "0.1uF/10V" CAP_C_0603x30 40.278,37.008 r90 top
C54 "0.1uF/10V" CAP_C_0603x30 46.094,47.868 r0 top
C55 "0.1uF/10V" CAP_C_0603x30 48.706,47.408 r180 top
C56 "0.1uF/10V" CAP_C_0603x30 42.389,37.008 r90 top
C57 "0.1uF/10V" CAP_C_0603x30 46.881,44.533 r180 top
C58 "0.1uF/10V" CAP_C_0603x30 38.912,40.318 r270 top
C59 "0.1uF/10V" CAP_C_0603x30 44.357,47.806 r270 top
C60 "18pF/10V" CAP_C_0603x30 47.676,54.102 r90 bottom
C61 "18pF/10V" CAP_C_0603x30 45.99,56.062 r0 bottom
C62 "18pF/10V" CAP_C_0603x30 42.389,56.062 r0 bottom
C63 "18pF/10V" CAP_C_0603x30 43.551,56.062 r180 bottom
C64 "4.7uF/10V" CAP_C_1005X50_L 55.431,22.483 r90 top
C65 "0.1uF/10V" CAP_C_0603x30 61.756,31.233 r90 top
C66 "0.1uF/10V" CAP_C_0603x30 54.656,24.033 r270 top
C67 "0.1uF/10V" CAP_C_0603x30 53.139,20.094 r90 top
C68 "0.1uF/10V" CAP_C_0603x30 53.139,21.659 r90 top
C69 "0.1uF/10V" CAP_C_0603x30 59.521,24.139 r0 top
C70 "0.1uF/10V" CAP_C_0603x30 61.756,23.244 r90 top
C71 "0.1uF/10V" CAP_C_0603x30 61.756,29.633 r90 top
C72 "0.1uF/10V" CAP_C_0603x30 54.656,22.433 r90 top
C73 "0.1uF/10V" CAP_C_0603x30 60.256,19.658 r0 top
C74 "0.1uF/10V" CAP_C_0603x30 53.256,31.283 r90 top
C75 "0.1uF/10V" CAP_C_0603x30 53.256,29.683 r90 top
C76 "0.1uF/10V" CAP_C_0603x30 55.056,26.083 r0 top
C77 "0.1uF/10V" CAP_C_0603x30 54.115,23.233 r270 top
C78 "0.1uF/10V" CAP_C_0603x30 60.784,22.101 r270 top
C79 "0.1uF/10V" CAP_C_0603x30 55.456,20.483 r0 top
C80 "0.1uF/10V" CAP_C_0603x30 59.142,26.838 r270 top
C81 "0.1uF/10V" CAP_C_0603x30 49.488,37.776 r0 top
C82 "0.1uF/10V" CAP_C_0603x30 61.756,20.876 r270 top
C83 "0.1uF/10V" CAP_C_0603x30 61.761,24.853 r270 top
C84 "4.7uF/10V" CAP_C_1005X50_L 60.256,18.545 r0 top
C85 "0.1uF/10V" CAP_C_0603x30 46.094,39.694 r270 top
C86 "0.1uF/10V" CAP_C_0603x30 44.981,39.354 r90 top
C87 "0.1uF/10V" CAP_C_0603x30 43.363,39.058 r90 top
C88 "0.1uF/10V" CAP_C_0603x30 46.898,39.708 r270 top
C89 "0.1uF/10V" CAP_C_0603x30 48.186,36.776 r90 top
C90 "0.1uF/10V" CAP_C_0603x30 44.431,37.058 r90 top
C91 "0.1uF/10V" CAP_C_0603x30 46.414,36.685 r270 top
C92 "0.1uF/10V" CAP_C_0603x30 42.131,42.958 r270 top
C93 "0.1uF/10V" CAP_C_0603x30 46.731,41.983 r180 top
C94 "0.1uF/10V" CAP_C_0603x30 41.156,41.258 r0 top
C95 "0.1uF/10V" CAP_C_0603x30 42.781,42.958 r270 top
C96 "0.1uF/10V" CAP_C_0603x30 44.681,41.408 r180 top
C97 "0.1uF/10V" CAP_C_0603x30 49.106,39.383 r180 top
C98 "0.1uF/10V" CAP_C_0603x30 45.423,40.348 r180 top
C99 "0.1uF/10V" CAP_C_0603x30 48.956,41.333 r180 top
C100 "4.7uF/10V" CAP_C_1005X50_L 49.686,36.671 r180 top
C101 "0.1uF/10V" CAP_C_0603x30 51.052,32.524 r180 bottom
C102 "4.7uF/10V" CAP_C_1005X50_L 50.059,32.239 r90 bottom
C103 "0.1uF/10V" CAP_C_0603x30 51.052,31.265 r0 bottom
C104 "0.1uF/10V" CAP_C_0603x30 53.285,24.838 r270 top
C105 "0.1uF/10V" CAP_C_0603x30 60.993,28.083 r0 top
C106 "4.7uF/10V" CAP_C_1005X50_L 27.894,16.034 r180 top
C107 "4.7uF/10V" CAP_C_1005X50_L 32.385,16.002 r180 top
C108 "0.1uF/10V" CAP_C_1005X50_L 27.894,20.225 r180 top
C109 "0.1uF/10V" CAP_C_1005X50_L 35.138,18.773 r90 top
C110 "0.1uF/10V" CAP_C_1005X50_L 27.894,17.046 r180 top
C111 "0.1uF/10V" CAP_C_1005X50_L 29.438,24.773 r270 top
C112 "0.1uF/10V" CAP_C_1005X50_L 27.894,24.289 r180 top
C113 "0.1uF/10V" CAP_C_1005X50_L 27.894,22.257 r180 top
C114 "0.1uF/10V" CAP_C_1005X50_L 27.894,25.257 r180 top
C115 "0.1uF/10V" CAP_C_1005X50_L 31.369,18.773 r270 top
C116 "1uF/20V" CAP_C_1005X50_L 27.891,27.305 r180 top
C117 "0.1uF/10V" CAP_C_1005X50_L 27.891,26.289 r180 top
C118 "4.7uF/10V" CAP_C_1005X50_L 25.862,60.325 r180 top
C119 "4.7uF/10V" CAP_C_1005X50_L 29.337,60.325 r180 top
C120 "0.1uF/10V" CAP_C_1005X50_L 25.862,64.516 r180 top
C121 "0.1uF/10V" CAP_C_1005X50_L 25.862,61.337 r180 top
C122 "0.1uF/10V" CAP_C_1005X50_L 30.892,64.393 r180 top
C123 "0.1uF/10V" CAP_C_1005X50_L 25.862,68.58 r180 top
C124 "0.1uF/10V" CAP_C_1005X50_L 29.337,63.064 r270 top
C125 "0.1uF/10V" CAP_C_1005X50_L 25.862,69.548 r180 top
C126 "0.1uF/10V" CAP_C_1005X50_L 27.406,69.064 r270 top
C127 "0.1uF/10V" CAP_C_1005X50_L 25.862,66.548 r180 top
C128 "1uF/20V" CAP_C_1005X50_L 22.479,68.537 r270 top
C129 "0.1uF/10V" CAP_C_1005X50_L 21.454,68.537 r270 top
C130 "0.1uF/10V" CAP_C_1005X50_L 30.335,78.232 r90 bottom
C131 "0.1uF/10V" CAP_C_1005X50_L 40.386,74.803 r180 bottom
C132 "1uF/20V" CAP_C_1005X50_L 31.442,78.218 r90 bottom
C133 "1uF/20V" CAP_C_1005X50_L 55.047,74.93 r0 top
C134 "0.1uF/10V" CAP_C_1005X50_L 24.003,37.465 r270 top
C135 "0.1uF/10V" CAP_C_1005X50_L 25.049,37.465 r270 top
C136 "0.1uF/10V" CAP_C_1005X50_L 42.672,80.264 r90 bottom
C143 "0.1uF/10V" CAP_C_1005X50_L 49.618,62.363 r180 bottom
C144 "0.1uF/10V" CAP_C_1005X50_L 43.307,62.357 r0 bottom
C145 "1uF/20V" CAP_C_1005X50_L 43.111,66.863 r0 top
C146 "1uF/20V" CAP_C_1005X50_L 67.716,74.93 r180 top
C147 "0.1uF/20V" CAP_C_1005X50_L 55.047,75.909 r0 top
C148 "1uF/20V" CAP_C_1005X50_L 57.285,81.265 r0 top
C149 "0.1uF/20V" CAP_C_1005X50_L 67.716,75.921 r180 top
C150 "1uF/20V" CAP_C_1005X50_L 65.938,81.265 r0 top
C151 "0.1uF/20V" CAP_C_1005X50_L 57.285,80.264 r0 top
C153 "0.1uF/20V" CAP_C_1005X50_L 65.938,80.264 r0 top
C154 "0.1uF/10V" CAP_C_1005X50_L 19.431,27.051 r180 bottom
C155 "0.1uF/10V" CAP_C_1005X50_L 19.431,28.125 r180 bottom
C156 "0.1uF/10V" CAP_C_1005X50_L 18.796,22.733 r270 bottom
C158 "0.1uF/10V" CAP_C_1005X50_L 25.654,51.112 r180 bottom
C159 "0.1uF/10V" CAP_C_1005X50_L 25.019,45.72 r270 bottom
C160 "2.2uF/10V" CAP_C_1005X50_L 47.752,8.255 r180 bottom
C161 "0.1uF/10V" CAP_C_1005X50_L 57.217,48.259 r0 top
C162 "0.1uF/10V" CAP_C_1005X50_L 61.722,52.324 r0 top
C163 "4.7uF/10V" CAP_C_1005X50_L 44.704,69.977 r90 bottom
C164 "0.1uF/10V" CAP_C_1005X50_L 45.72,69.977 r90 bottom
C165 "47uF/25V" CAP_C_3225X80 73.208,67.227 r0 top
C166 "47uF/25V" CAP_C_3225X80 78.288,67.227 r180 top
C167 "47uF/25V" CAP_C_3225X80 78.28,71.544 r180 top
C168 "1uF/20V" CAP_C_1005X50_L 73.215,70.215 r0 top
C169 "2.2nF/10V" CAP_C_1005X50_L 78.604,69.505 r180 bottom
C170 "2.2nF/10V" CAP_C_1005X50_L 78.604,72.553 r180 bottom
C171 "0.1uF/10V" CAP_C_1608X80_L 77.709,24.681 r0 bottom
C173 "10uF/20V" CAP_C_2012X110 75.819,32.004 r0 top
C174 "10uF/20V" CAP_C_2012X110 78.308,11.43 r180 top
C175 "47uF/25V" CAP_C_3225X80 73.411,12.573 r0 top
C176 "0.1uF/10V" CAP_C_1005X50_L 61.341,80.899 r180 top
C177 "10uF/20V" CAP_C_2012X110 75.833,61.87 r0 top
C178 "10uF/20V" CAP_C_2012X110 75.833,58.144 r0 top
C179 "10uF/20V" CAP_C_2012X110 75.819,25.527 r0 top
C180 "10uF/20V" CAP_C_2012X110 78.308,13.589 r180 top
C181 "0.1uF/10V" CAP_C_1005X50_L 33.106,63.064 r90 top
C182 "0.1uF/10V" CAP_C_1005X50_L 32.924,20.102 r180 top
CR1 "IP4220CZ6,125" DIODE_SOT457_1P7X3P1_NEX 41.275,74.803 r180 top
CR2 "IP4220CZ6,125" DIODE_SOT457_1P7X3P1_NEX 41.275,79.375 r180 top
D5 "SS54" DO-214AC_SMA 75.748,66.973 r0 bottom value=SS34
D6 "1N4148W-TP" SOD123_MCC 75.81,75.819 r0 bottom
D7 "SS54" DO-214AC_SMA 75.736,21.92 r180 bottom value=SS34
D11 "1N4148W-TP" SOD123_MCC 86.233,35.598 r180 bottom
D13 "1N4148W-TP" SOD123_MCC 32.207,75.692 r180 bottom
H1 "ESQ-126-14-G-D" SAMTEC_ESQ-126-14-G-D 11.19,13.88 r90 top locked
H2 "ESQ-126-14-G-D" SAMTEC_ESQ-126-14-G-D 6.11,13.88 r90 top locked
H3 "9774060360R" M4.4 16.72,4.6 r0 top locked
H4 "9774060360R" M4.4 75.72,4.6 r0 top locked
H5 "9774060360R" M4.4 75.72,38.6 r0 top locked
H6 "9774060360R" M4.4 16.72,38.6 r0 top locked
H7 "9774060360R" M4.4 81.64,48.41 r0 top locked
H8 "9774060360R" M4.4 16.9,82.67 r0 top locked
H9 "9774060360R" M4.4 16.9,48.41 r0 top locked
H10 "9774060360R" M4.4 81.64,82.67 r0 top locked
Hole1 "hole_space" HEX-M3_NoVia 3.57,8.8 r0 top locked
Hole2 "hole_space" HEX-M3_NoVia 3.57,82.46 r0 top locked
Hole3 "hole_space" HEX-M3_NoVia 89.3,85 r0 top locked
Hole4 "hole_space" HEX-M3_NoVia 89.3,5 r0 top locked
J1 "Header 8x1" Header_254P_8x1 69.469,43.815 r270 bottom
J2 "Molex_1051620001" MOLEX_1051620001 30.607,76.708 r180 top locked
J3 "0532610471" MOLEX_0532610471 44.526,85.225 r0 bottom locked
J4 "5040500591" 5040500591 87.825,65.837 r90 bottom locked
J5 "0532610271" MOLEX_0532610271 61.333,85.225 r180 top locked
J6 "5040500991" MOLEX_5040500991 87.825,24.435 r270 top locked
J7 "5040500891" MOLEX_5040500891 87.679,24.451 r90 bottom locked
J8 "5040500691" 5040500691 87.825,65.837 r270 top locked
J11 "5040500991" 5040500991 61.306,84.822 r180 bottom locked
J12 "FSI-110-03-G-D-AD" SAMTEC_FSI-110-03-X-D-AD-TR 19.42,15.6 r90 top locked
J13 "HEADER 4x1" MOLEX_5040500491 30.696,84.684 r180 bottom locked
J14 "TLE-110-01-G-DV-A-TR" SAMTEC-TLE-110-01-X-DV-A 16.615,66.21 r270 top locked
J15 "5040500691" 5040500691 32.365,5.175 r0 bottom locked
J16 "5040500691" 5040500691 60.635,5.175 r0 bottom
JP3 "JUMPER_254P_NOPLACE" JUMPER_254P_2X1_ANGLE 85.344,75.692 r270 bottom
L1 "1.5uH 3.5A" IND_C_1008 66.69,75.868 r0 bottom
L2 "1.5uH 3.5A" IND_C_1008 66.69,66.118 r0 bottom
L3 "1.5uH 3.5A" IND_C_1008 56.156,66.118 r180 bottom
L4 "1.5uH 3.5A" IND_C_1008 56.156,75.868 r180 bottom
L5 "SRP7050TA-220M" SRP7050TA-220M 75.653,15.062 r270 bottom
R1 "0R" RES_C_0603X30 59.456,66.437 r90 bottom
R2 "0R" RES_C_0603X30 58.829,66.441 r90 bottom
R3 "1k" RES_C_0603X30 63.141,75.565 r270 bottom
R4 "4.7k" RES_C_1005x30_L 58.689,56.668 r180 bottom
R5 "4.7k" RES_C_1005x30_L 60.594,56.668 r180 bottom
R6 "100k" RES_C_0603X30 62.556,75.565 r90 bottom
R7 "10k" RES_C_0603X30 60.16,75.579 r90 bottom
R8 "10k" RES_C_0603X30 59.563,75.573 r90 bottom
R9 "10k" RES_C_1005x30_L 64.135,56.007 r270 bottom
R11 "0R" RES_C_0603X30 58.124,59.88 r180 bottom
R12 "10k" RES_C_1005x30_L 63.627,66.421 r270 top
R13 "10k" RES_C_1005x30_L 62.42,66.421 r90 top
R14 "Shunt 4 Pin" RES_C_1206_SHUNT 67.198,60.224 r270 top value=0.047R
R15 "Shunt 4 Pin" RES_C_1206_SHUNT 67.198,60.224 r270 bottom value=0.047R
R16 "Shunt 4 Pin" RES_C_1206_SHUNT 55.641,60.224 r270 bottom value=0.047R
R17 "Shunt 4 Pin" RES_C_1206_SHUNT 55.641,60.224 r270 top value=0.047R
R18 "10k" RES_C_0603X30 52.578,48.006 r180 bottom
R19 "10k" RES_C_0603X30 52.578,48.641 r180 top
R20 "5.62k" RES_C_0603X30 46.15,43.251 r180 top
R21 "DNP/10k" RES_C_0603X30 52.578,44.704 r0 top
R22 "10k" RES_C_0603X30 52.578,44.069 r180 top
R23 "16.9k" RES_C_0603X30 40.208,42.933 r0 top
R24 "16.9k" RES_C_0603X30 40.231,39.683 r90 top
R25 "20k" RES_C_0603X30 38.505,54.102 r270 bottom
R26 "16.9k" RES_C_0603X30 41.156,49.458 r270 top
R27 "1k" RES_C_0603X30 37.615,37.008 r270 top
R28 "DNP/0R" RES_C_1005x30_L 52.324,90.99 r270 bottom
R29 "1M 1%" RES_C_1005x30_L 45.403,52.983 r0 bottom
R30 "1M 1%" RES_C_1005x30_L 43.376,52.983 r180 bottom
R31 "22R" RES_C_0603X30 36.703,32.385 r270 bottom
R32 "22R" RES_C_0603X30 37.338,32.385 r270 bottom
R33 "22R" RES_C_0603X30 31.496,46.101 r180 bottom
R34 "22R" RES_C_0603X30 40.513,32.385 r270 top
R35 "22R" RES_C_0603X30 36.068,32.385 r270 bottom
R36 "DNP/4.7k" RES_C_0603X30 31.496,52.197 r180 bottom
R37 "22R" RES_C_0603X30 35.433,32.385 r270 bottom
R38 "22R" RES_C_0603X30 37.973,32.385 r270 bottom
R39 "22R" RES_C_0603X30 39.878,32.385 r270 top
R40 "22R" RES_C_0603X30 31.496,43.561 r180 bottom
R41 "22R" RES_C_0603X30 34.798,32.385 r270 bottom
R42 "22R" RES_C_0603X30 31.496,50.292 r180 bottom
R43 "DNP/4.7k" RES_C_0603X30 41.021,55.245 r270 bottom
R44 "22R" RES_C_0603X30 40.513,32.385 r270 bottom
R45 "4.7k" RES_C_1005x30_L 17.78,15.113 r0 bottom
R46 "22R" RES_C_0603X30 39.243,32.385 r270 bottom
R47 "4.7k" RES_C_1005x30_L 17.78,16.129 r0 bottom
R48 "22R" RES_C_0603X30 41.783,32.385 r270 bottom
R49 "1k" RES_C_1005x30_L 80.01,74.803 r180 bottom
R50 "22R" RES_C_0603X30 41.148,32.385 r270 bottom
R51 "4.7k" RES_C_1005x30_L 49.657,60.325 r180 bottom
R52 "4.7k" RES_C_1005x30_L 43.307,60.325 r0 bottom
R53 "0R" RES_C_1005x30_L 82.629,65.44 r0 top
R54 "4.7k" RES_C_0603X30 31.496,48.641 r180 bottom
R55 "22R" RES_C_0603X30 37.973,32.385 r270 top
R56 "22R" RES_C_0603X30 43.053,32.385 r270 bottom
R57 "4.7k" RES_C_0603X30 39.751,55.245 r270 bottom
R58 "22R" RES_C_0603X30 38.608,32.385 r270 top
R59 "22R" RES_C_0603X30 31.96,36.3 r180 top
R60 "22R" RES_C_0603X30 34.671,54.102 r90 bottom
R61 "22R" RES_C_0603X30 41.783,32.377 r270 top
R62 "22R" RES_C_0603X30 36.703,54.102 r90 bottom
R63 "22R" RES_C_0603X30 42.418,32.377 r270 top
R64 "22R" RES_C_0603X30 37.293,54.102 r90 bottom
R65 "22R" RES_C_0603X30 42.418,32.385 r270 bottom
R66 "22R" RES_C_0603X30 35.474,54.105 r90 bottom
R67 "22R" RES_C_0603X30 31.496,50.927 r180 bottom
R68 "22R" RES_C_0603X30 37.893,54.102 r90 bottom
R69 "22R" RES_C_0603X30 31.496,44.831 r180 bottom
R70 "22R" RES_C_0603X30 36.093,54.1 r90 bottom
R71 "22R" RES_C_0603X30 39.116,54.11 r90 bottom
R72 "22R" RES_C_0603X30 31.496,47.752 r180 top
R73 "22R" RES_C_0603X30 31.496,44.196 r180 bottom
R74 "22R" RES_C_0603X30 31.496,46.736 r180 bottom
R75 "0R" RES_C_1005x30_L 82.629,66.456 r0 top
R76 "22R" RES_C_0603X30 38.481,54.102 r90 top
R77 "0R" RES_C_1005x30_L 82.629,67.472 r0 top
R78 "22R" RES_C_0603X30 45.803,54.088 r90 top
R79 "22R" RES_C_0603X30 41.021,54.102 r90 top
R80 "22R" RES_C_0603X30 47.117,54.102 r90 top
R81 "22R" RES_C_0603X30 31.496,52.832 r180 bottom
R82 "22R" RES_C_0603X30 47.752,54.102 r90 top
R83 "DNP/22R" RES_C_0603X30 41.021,54.102 r90 bottom
R84 "DNP/22R" RES_C_0603X30 31.496,51.562 r180 bottom
R85 "22R" RES_C_0603X30 40.386,54.102 r90 top
R86 "22R" RES_C_0603X30 39.751,54.11 r90 top
R87 "22R" RES_C_0603X30 31.496,45.466 r180 bottom
R88 "22R" RES_C_0603X30 52.578,48.641 r0 bottom
R89 "22R" RES_C_0603X30 40.386,54.102 r90 bottom
R90 "22R" RES_C_0603X30 52.578,44.831 r0 bottom
R91 "22R" RES_C_0603X30 31.496,49.022 r180 top
R92 "22R" RES_C_0603X30 52.578,47.371 r0 bottom
R93 "22R" RES_C_0603X30 31.496,48.387 r180 top
R94 "22R" RES_C_0603X30 52.578,44.196 r0 bottom
R95 "22R" RES_C_0603X30 31.496,48.006 r180 bottom
R96 "22R" RES_C_0603X30 46.482,54.102 r90 top
R97 "22R" RES_C_0603X30 39.751,54.102 r90 bottom
R98 "22R" RES_C_0603X30 31.496,47.117 r180 top
R99 "22R" RES_C_0603X30 35.306,54.102 r90 top
R100 "22R" RES_C_0603X30 42.037,54.102 r90 top
R101 "22R" RES_C_0603X30 52.578,46.99 r0 top
R102 "22R" RES_C_0603X30 52.578,49.276 r0 top
R103 "22R" RES_C_0603X30 52.578,45.72 r0 top
R104 "22R" RES_C_0603X30 52.578,49.911 r0 top
R105 "22R" RES_C_0603X30 52.578,46.355 r0 top
R106 "22R" RES_C_0603X30 37.846,54.102 r90 top
R107 "22R" RES_C_0603X30 37.211,54.102 r90 top
R108 "22R" RES_C_0603X30 36.576,54.102 r90 top
R109 "0R" RES_C_1005x30_L 82.629,68.488 r0 top
R110 "22R" RES_C_0603X30 35.941,54.102 r90 top
R111 "22R" RES_C_0603X30 31.496,50.927 r180 top
R112 "22R" RES_C_0603X30 39.116,54.102 r90 top
R113 "22R" RES_C_0603X30 31.496,47.371 r180 bottom
R114 "0R" RES_C_0603X30 46.685,76.454 r90 bottom
R115 "0R" RES_C_0603X30 47.32,76.454 r90 bottom
R116 "0R" RES_C_0603X30 55.626,45.72 r180 bottom
R117 "0R" RES_C_0603X30 55.626,46.355 r180 bottom
R118 "DNP/0R" RES_C_0603X30 55.626,47.625 r180 bottom
R119 "DNP/0R" RES_C_0603X30 55.626,46.99 r180 bottom
R120 "DNP/0R" RES_C_1005x30_L 75.819,80.518 r0 top
R121 "22R" RES_C_0603X30 39.878,32.385 r270 bottom
R122 "DNP/10k" RES_C_1005x30_L 61.214,66.421 r270 top
R123 "22R" RES_C_0603X30 38.608,32.385 r270 bottom
R124 "10k" RES_C_1005x30_L 60.008,66.421 r90 top
R125 "22R" RES_C_0603X30 42.672,54.102 r90 top
R126 "22R" RES_C_0603X30 48.387,54.102 r90 bottom
R127 "100k" RES_C_0603X30 53.002,33.285 r180 bottom
R128 "240R" RES_C_0603X30 48.204,35.693 r90 top
R129 "1k" RES_C_0603X30 51.052,33.154 r180 bottom
R130 "1k" RES_C_0603X30 51.052,31.895 r0 bottom
R131 "240R" RES_C_0603X30 62.018,27.283 r180 top
R132 "10k" RES_C_1005x30_L 30.976,25.273 r0 top
R133 "10k" RES_C_1005x30_L 34.969,25.257 r180 top
R134 "10k" RES_C_1005x30_L 30.976,24.273 r0 top
R135 "10k" RES_C_1005x30_L 34.963,24.248 r180 top
R136 "10k" RES_C_1005x30_L 32.943,18.323 r90 top
R137 "10k" RES_C_1005x30_L 30.919,20.773 r180 top
R138 "10k" RES_C_1005x30_L 34.417,17.018 r180 top
R139 "10k" RES_C_1005x30_L 31.369,17.018 r180 top
R140 "10k" RES_C_1005x30_L 35.863,21.273 r180 top
R141 "10k" RES_C_1005x30_L 35.863,22.273 r180 top
R142 "10k" RES_C_1005x30_L 32.357,21.77 r0 top
R143 "10k" RES_C_1005x30_L 28.944,69.564 r0 top
R144 "10k" RES_C_1005x30_L 32.937,69.548 r180 top
R145 "10k" RES_C_1005x30_L 28.944,68.564 r0 top
R146 "10k" RES_C_1005x30_L 32.931,68.539 r180 top
R147 "10k" RES_C_1005x30_L 33.831,65.564 r180 top
R148 "10k" RES_C_1005x30_L 33.831,66.564 r180 top
R149 "10k" RES_C_1005x30_L 30.892,66.518 r0 top
R150 "DNP/10k" RES_C_1005x30_L 33.655,78.232 r270 bottom
R151 "DNP/10k" RES_C_1005x30_L 34.762,78.261 r270 bottom
R152 "DNP/10k" RES_C_1005x30_L 27.015,78.232 r270 bottom
R153 "DNP/10k" RES_C_1005x30_L 28.122,78.219 r270 bottom
R154 "DNP/10k" RES_C_1005x30_L 32.549,78.232 r270 bottom
R155 "DNP/10k" RES_C_1005x30_L 29.228,78.225 r270 bottom
R156 "10k" RES_C_1005x30_L 25.908,78.232 r90 bottom
R157 "4.7k" RES_C_1005x30_L 24.587,42.316 r90 top
R159 "10k" RES_C_1005x30_L 43.878,80.264 r270 bottom
R160 "10k" RES_C_1005x30_L 45.085,80.264 r270 bottom
R164 "4.7k" RES_C_1005x30_L 49.657,61.341 r180 bottom
R165 "4.7k" RES_C_1005x30_L 43.307,61.341 r0 bottom
R166 "4.7k" RES_C_1005x30_L 49.618,63.379 r180 bottom
R167 "22R" RES_C_1005x30_L 50.038,66.863 r0 top
R168 "22R" RES_C_1005x30_L 50.038,65.913 r0 top
R169 "22R" RES_C_1005x30_L 50.038,64.963 r0 top
R170 "16.5k" RES_C_1005x30_L 43.111,64.958 r180 top
R171 "16.5k" RES_C_1005x30_L 43.111,65.913 r180 top
R172 "100R" RES_C_1005x30_L 56.017,80.264 r0 bottom
R173 "100R" RES_C_1005x30_L 63.549,80.264 r0 bottom
R174 "100R" RES_C_1005x30_L 59.066,80.264 r0 bottom
R175 "100R" RES_C_1005x30_L 66.564,80.264 r0 bottom
R176 "DNP/0R" RES_C_1005x30_L 75.819,79.502 r0 top
R177 "DNP/0R" RES_C_1005x30_L 75.819,78.359 r0 top
R178 "60R" RES_C_1005x30_L 20.51,22.708 r0 top
R179 "22R" RES_C_1005x30_L 17.526,22.733 r90 bottom
R180 "60R" RES_C_1005x30_L 18.346,22.708 r0 top
R181 "10k" RES_C_1005x30_L 20.066,22.733 r270 bottom
R182 "DNP/0R" RES_C_1005x30_L 75.819,77.343 r0 top
R184 "60R" RES_C_1005x30_L 26.733,45.695 r0 top
R185 "22R" RES_C_1005x30_L 23.749,45.72 r90 bottom
R186 "60R" RES_C_1005x30_L 24.569,45.695 r0 top
R187 "10k" RES_C_1005x30_L 26.289,45.72 r270 bottom
R188 "100R" RES_C_1005x30_L 45.212,8.255 r180 bottom
R191 "4.7k" RES_C_1005x30_L 62.909,46.228 r0 top
R192 "4.7k" RES_C_1005x30_L 57.229,50.581 r180 top
R193 "DNP/4.7k" RES_C_1005x30_L 60.579,46.228 r180 top
R194 "DNP/120R" RES_C_1005x30_L 65.78,50.38 r270 top
R195 "DNP/120R" RES_C_1005x30_L 65.78,48.221 r270 top
R196 "4.7k" RES_C_1005x30_L 57.229,49.692 r0 top
R197 "10k" RES_C_1005x30_L 49.657,72.608 r0 bottom
R198 "1k" RES_C_1005x30_L 43.132,73.625 r0 bottom
R199 "1k" RES_C_1005x30_L 43.132,72.609 r0 bottom
R200 "47k" RES_C_1005x30_L 73.004,72.561 r180 bottom
R201 "47k" RES_C_1005x30_L 73.004,73.577 r180 bottom
R203 "470k" RES_C_1005x30_L 73.005,70.529 r0 bottom
R204 "47k" RES_C_1005x30_L 73.004,71.545 r180 bottom
R205 "10k" RES_C_1005x30_L 73.016,69.505 r180 bottom
R206 "10k" RES_C_1005x30_L 80.01,75.819 r180 bottom
R207 "1k" RES_C_1005x30_L 78.604,70.521 r0 bottom
R208 "3.24k" RES_C_1005x30_L 80.01,76.835 r180 bottom
R210 "10k" RES_C_1005x30_L 73.645,24.681 r0 bottom
R211 "3.24k" RES_C_1005x30_L 75.423,24.681 r0 bottom
R214 "1k" RES_C_1005x30_L 86.233,37.592 r180 bottom
R215 "0R" RES_C_1005x30_L 14.351,18.796 r0 bottom
R216 "DNP/0R" RES_C_1005x30_L 14.351,25.4 r180 bottom
R217 "DNP/0R" RES_C_1005x30_L 14.351,26.565 r180 bottom
R218 "DNP/0R" RES_C_1005x30_L 14.351,27.686 r180 bottom
R219 "DNP/0R" RES_C_1005x30_L 14.351,28.702 r180 bottom
R220 "0R" RES_C_1005x30_L 61.386,10.541 r270 top
R221 "0R" RES_C_1005x30_L 59.889,10.541 r270 top
R222 "0R" RES_C_1005x30_L 58.393,10.541 r270 top
R223 "0R" RES_C_1005x30_L 56.896,10.541 r270 top
R224 "DNP/0R" RES_C_1005x30_L 14.351,59.309 r180 bottom
R225 "DNP/0R" RES_C_1005x30_L 14.351,58.166 r0 bottom
R226 "DNP/0R" RES_C_1005x30_L 14.351,62.131 r180 bottom
R227 "DNP/0R" RES_C_1005x30_L 14.351,55.88 r0 bottom
R228 "0R" RES_C_1005x30_L 14.351,66.167 r180 bottom
R229 "0R" RES_C_1005x30_L 14.351,63.5 r0 bottom
R230 "0R" RES_C_1005x30_L 14.351,67.183 r180 bottom
R231 "0R" RES_C_1005x30_L 14.351,64.516 r0 bottom
R232 "1k" RES_C_1005x30_L 28.321,75.692 r0 bottom
R234 "DNP/0R" RES_C_1005x30_L 14.351,17.653 r180 bottom
R235 "DNP/0R" RES_C_1005x30_L 14.351,16.51 r180 bottom
R236 "DNP/0R" RES_C_0603X30 49.149,76.073 r180 bottom
R237 "DNP/0R" RES_C_0603X30 49.149,76.708 r180 bottom
R238 "DNP/0R" RES_C_1005x30_L 33.909,10.16 r0 bottom
R239 "DNP/0R" RES_C_1005x30_L 61.386,10.541 r270 bottom
R240 "DNP/0R" RES_C_1005x30_L 59.889,10.541 r270 bottom
R241 "DNP/0R" RES_C_1005x30_L 30.861,10.16 r180 bottom
R242 "DNP/0R" RES_C_1005x30_L 58.393,10.541 r270 bottom
R243 "DNP/0R" RES_C_1005x30_L 56.896,10.541 r270 bottom
SB1 "JUMPER" JUMPER_1608 46.482,63.246 r180 top
SB2 "JUMPER" JUMPER_1608 73.222,72.299 r0 top
SB3 "JUMPER" JUMPER_1608 86.868,57.785 r180 bottom
SB4 "JUMPER" JUMPER_1608 86.868,55.88 r180 bottom
U1 "MCP16502 QFN-32" QFN-32_5X5_EP3.7X3.7 61.356,70.993 r270 bottom value=MCP16502TAB-E/S8B
U2 "Microchip PAC1934 UQFN-16" UQFN-16_4X4_EP2.6X2.6 61.427,60.192 r90 bottom locked value=PAC1934
U3 "SAMA7D65" TFBGA-343_14X14 42.478,43.262 r180 bottom locked value=SAMA7D65-V/4HB-SL3
U4 "IS43TR16512BL-125KBLI" TWBGA96_ISI 57.478,25.662 r0 bottom
U5 "MTFC32GAZAQDW-AAT" BGA_100_C_100P_10X17_1400X1800X150 30.4,21.773 r270 bottom locked
U6 "MTFC32GAZAQDW-AAT" BGA_100_C_100P_10X17_1400X1800X150 28.368,66.064 r270 bottom locked
U7 "AS3004204-0108X0PSAY" SOIC127P790X216-8N 26.478,38.737 r270 bottom
U8 "473460001" 47346-0001_MOL 46.482,86.157 r180 top
U12 "RV-3129-C3-32.768KHZ-OPTION-A-TB-QA" IC_RV-3129-C3-32.768KHZ-OPTION-A-TB-QA 46.482,61.976 r180 bottom
U13 "TPL5010DDCR" TPL5010DDCR 46.482,65.913 r0 top
U14 "DS90LV011AQ-Q1" DS90LV011AQ-Q1 55.047,78.211 r180 top
U15 "DS90LV011AQ-Q1" DS90LV011AQ-Q1 63.768,78.211 r180 top
U16 "DS90LT012AQ-Q1" DS90LV011AQ-Q1 59.492,78.211 r0 top
U17 "DS90LT012AQ-Q1" DS90LV011AQ-Q1 68.128,78.211 r0 top
U20 "LTC2865HMSE#TRPBF" MSOP-12_MSE_LIT 61.722,49.276 r0 top locked
U21 "FSUSB74MPX" QFN50P300X300X80-17N 46.482,73.152 r90 bottom
U22 "TPS259470ARPWR" VQFN-HR-10 75.81,71.537 r0 bottom
U23 "TPS5430DDAR" CONV_TPS5430DDAR 75.829,29.195 r90 bottom
VR1 "LM1117MP-3.3/NOPB" VREG_LM1117MP-3.3/NOPB 75.833,58.949 r270 bottom
VR2 "LM1117MP-3.3/NOPB" VREG_LM1117MP-3.3/NOPB 75.946,19.685 r90 top
Y1 "Crystal 4 Pins" XTAL_ECS2401037B2JTNTR 45.973,54.557 r180 bottom value=24MHz
Y2 "Crystal 2 Pins" CRYSTAL_FC-12M_L2.05W1.2H0.6 42.926,54.58 r0 bottom value="32.768 kHz"

## Footprints (in the part's own frame and the unit in brackets; to place one, negate y for a bottom-side part, rotate by r counter-clockwise, add the part's x,y. Pads: shape width x height; smd on the part's side, far side on the other; paste and mask are expansions set on the pad)
47346-0001_MOL [mil]
  rect 18x54 smd paste+0 mask+0: 1(-51.18,101.58) 2(-25.59,101.58) 3(0,101.58) 4(25.59,101.58) 5(51.18,101.58)
  rect 56x61 smd paste+0 mask+0: 6(-97.93,98.24) 7(97.93,98.24)
  rect 65x51 smd paste+0 mask+0: 8(-132.87,-3.14) 9(132.87,-3.14)
  rect 71x75 smd paste+0 mask+0: 10(-45.28,-3.14)
  rect 39x75 smd paste+0 mask+0: 11(61,-3.14)
  silkscreen extent -117,-118 117,159, body extent -157,-109 157,104, height 106
5040500591 [mil]
  rect 26x41 smd: 1(118.11,-119.76) 2(59.06,-119.76) 3(0,-119.76) 4(-59.06,-119.76) 5(-118.11,-119.76)
  rect 51x73 smd: 6(-208.86,84.57) 6(208.86,84.57)
  silkscreen extent -226,-173 226,125, body extent -237,-134 237,120, height 79
5040500691 [mil]
  rect 26x41 smd paste+0: 1(147.64,-119.76) 2(88.58,-119.76) 3(29.53,-119.76) 4(-29.53,-119.76) 5(-88.58,-119.76) 6(-147.64,-119.76)
  rect 51x73 smd: 7(-238.19,84.57) 7(238.19,84.57)
  silkscreen extent -256,-173 256,125, body extent -267,-128 267,126, height 79
5040500991 [mil]
  rect 26x41 smd: 1(236.22,-119.76) 2(177.17,-119.76) 3(118.11,-119.76) 4(59.06,-119.76) 5(0,-119.76) 6(-59.06,-119.76) 7(-118.11,-119.76) 8(-177.17,-119.76) 9(-236.22,-119.76)
  rect 51x73 smd: M1(326.97,84.57) M2(-326.97,84.57)
  silkscreen extent -344,-173 344,126, body extent -354,-129 357,124, height 79
BGA_100_C_100P_10X17_1400X1800X150 [mm] "BGA, 100-Leads, Body 14.00x18.00mmx1.50mm, Pitch 1.00mm"
  round 0.49 smd: A1(-4.5,8) A2(-3.5,8) A9(3.5,8) A10(4.5,8) B1(-4.5,7) B10(4.5,7) D2(-3.5,5) D3(-2.5,5) D4(-1.5,5) D5(-0.5,5) D6(0.5,5) D7(1.5,5) D8(2.5,5) D9(3.5,5) E2(-3.5,4) E3(-2.5,4) E4(-1.5,4) E5(-0.5,4) E6(0.5,4) E7(1.5,4) E8(2.5,4) E9(3.5,4) F2(-3.5,3) F3(-2.5,3) F4(-1.5,3) F5(-0.5,3) F6(0.5,3) F7(1.5,3) F8(2.5,3) F9(3.5,3) G2(-3.5,2) G3(-2.5,2) G4(-1.5,2) G5(-0.5,2) G6(0.5,2) G7(1.5,2) G8(2.5,2) G9(3.5,2) H2(-3.5,1) H3(-2.5,1) H4(-1.5,1) H5(-0.5,1) H6(0.5,1) H7(1.5,1) H8(2.5,1) H9(3.5,1) J2(-3.5,0) J3(-2.5,0) J4(-1.5,0) J5(-0.5,0) J6(0.5,0) J7(1.5,0) J8(2.5,0) J9(3.5,0) K2(-3.5,-1) K3(-2.5,-1) K4(-1.5,-1) K5(-0.5,-1) K6(0.5,-1) K7(1.5,-1) K8(2.5,-1) K9(3.5,-1) L2(-3.5,-2) L3(-2.5,-2) L4(-1.5,-2) L5(-0.5,-2) L6(0.5,-2) L7(1.5,-2) L8(2.5,-2) L9(3.5,-2) M2(-3.5,-3) M3(-2.5,-3) M4(-1.5,-3) M5(-0.5,-3) M6(0.5,-3) M7(1.5,-3) M8(2.5,-3) M9(3.5,-3) N2(-3.5,-4) N3(-2.5,-4) N4(-1.5,-4) N5(-0.5,-4) N6(0.5,-4) N7(1.5,-4) N8(2.5,-4) N9(3.5,-4) P2(-3.5,-5) P3(-2.5,-5) P4(-1.5,-5) P5(-0.5,-5) P6(0.5,-5) P7(1.5,-5) P8(2.5,-5) P9(3.5,-5) T1(-4.5,-7) T10(4.5,-7) U1(-4.5,-8) U2(-3.5,-8) U9(3.5,-8) U10(4.5,-8)
  round 0.35 on Mech9 paste+0 mask+0: A1(-4.5,8) A2(-3.5,8) A9(3.5,8) A10(4.5,8) B1(-4.5,7) B10(4.5,7) D2(-3.5,5) D3(-2.5,5) D4(-1.5,5) D5(-0.5,5) D6(0.5,5) D7(1.5,5) D8(2.5,5) D9(3.5,5) E2(-3.5,4) E3(-2.5,4) E4(-1.5,4) E5(-0.5,4) E6(0.5,4) E7(1.5,4) E8(2.5,4) E9(3.5,4) F2(-3.5,3) F3(-2.5,3) F4(-1.5,3) F5(-0.5,3) F6(0.5,3) F7(1.5,3) F8(2.5,3) F9(3.5,3) G2(-3.5,2) G3(-2.5,2) G4(-1.5,2) G5(-0.5,2) G6(0.5,2) G7(1.5,2) G8(2.5,2) G9(3.5,2) H2(-3.5,1) H3(-2.5,1) H4(-1.5,1) H5(-0.5,1) H6(0.5,1) H7(1.5,1) H8(2.5,1) H9(3.5,1) J2(-3.5,0) J3(-2.5,0) J4(-1.5,0) J5(-0.5,0) J6(0.5,0) J7(1.5,0) J8(2.5,0) J9(3.5,0) K2(-3.5,-1) K3(-2.5,-1) K4(-1.5,-1) K5(-0.5,-1) K6(0.5,-1) K7(1.5,-1) K8(2.5,-1) K9(3.5,-1) L2(-3.5,-2) L3(-2.5,-2) L4(-1.5,-2) L5(-0.5,-2) L6(0.5,-2) L7(1.5,-2) L8(2.5,-2) L9(3.5,-2) M2(-3.5,-3) M3(-2.5,-3) M4(-1.5,-3) M5(-0.5,-3) M6(0.5,-3) M7(1.5,-3) M8(2.5,-3) M9(3.5,-3) N2(-3.5,-4) N3(-2.5,-4) N4(-1.5,-4) N5(-0.5,-4) N6(0.5,-4) N7(1.5,-4) N8(2.5,-4) N9(3.5,-4) P2(-3.5,-5) P3(-2.5,-5) P4(-1.5,-5) P5(-0.5,-5) P6(0.5,-5) P7(1.5,-5) P8(2.5,-5) P9(3.5,-5) T1(-4.5,-7) T10(4.5,-7) U1(-4.5,-8) U2(-3.5,-8) U9(3.5,-8) U10(4.5,-8)
  silkscreen extent -7.77,-9 7,9, body extent -7,-9 7,9, height 1.5
CAP_C_0603x30 [mm] "Chip Capacitor, 2-Leads, Body 0.6x0.3mm, IPC Medium Density"
  rrect50% 0.275x0.3 smd mask+0.05: 1(-0.262,0) 2(0.262,0)
  body extent -0.3,-0.15 0.3,0.15, height 0.28
CAP_C_1005X50_L [mm] "Chip Capacitor, 2-Leads, Body 1.0x0.5mm, IPC High Density"
  rrect50% 0.55x0.6 smd mask+0.05: 1(-0.45,0) 2(0.45,0)
  body extent -0.5,-0.3 0.5,0.3, height 0.2
CAP_C_1608X80 [mm] "Chip Capacitor, 2-Leads, Body 1.60x0.80mm, IPC Medium Density"
  rrect50% 0.8x0.9 smd: 1(-0.8,0) 2(0.8,0)
  silkscreen extent -0.9,-0.7 0.9,0.7, body extent -0.87,-0.48 0.87,0.48, height 0.85
CAP_C_1608X80_L [mm] "Chip Capacitor, 2-Leads, Body 1.60x0.80mm, IPC High Density"
  rrect50% 0.75x0.95 smd: 1(-0.725,0) 2(0.725,0)
  silkscreen extent -0.2,-0.5 0.2,0.5, body extent -0.87,-0.48 0.87,0.48, height 0.85
CAP_C_2012X110 [mm] "Chip Capacitor, 2-Leads, Body 2.00x1.25mm, IPC High Density"
  rrect41% 1.2x1.3 smd: 1(-0.9,0) 2(0.9,0)
  silkscreen extent -1.1,-0.9 1.1,0.9, body extent -1.1,-0.72 1.1,0.72, height 1.1
CAP_C_3225X80 [mm] "Chip Capacitor, 2-Leads, Body 3.20x2.50mm, IPC Medium Density"
  rrect38% 1.3x2.7 smd: 1(-1.4,0) 2(1.4,0)
  silkscreen extent -0.6,-1.35 0.6,1.35, body extent -1.7,-1.35 1.7,1.35, height 0.75
CONV_TPS5430DDAR [mm] "IC REG BUCK ADJ 3A 8SOPWR"
  rrect10% 1.55x0.6 smd mask+0: 1(-2.7,1.905) 2(-2.7,0.635) 3(-2.7,-0.635) 4(-2.7,-1.905) 5(2.7,-1.905) 6(2.7,-0.635) 7(2.7,0.635) 8(2.7,1.905)
  round 0.3 hole 0.2 mask+0: 6(-0.65,-1.95) 6(-0.65,-0.65) 6(-0.65,0.65) 6(-0.65,1.95) 6(0.65,-1.95) 6(0.65,-0.65) 6(0.65,0.65) 6(0.65,1.95)
  rect 2.95x4.9 smd paste+0: 9(0,0)
  silkscreen extent -4.17,-2.69 1.96,2.72, body extent -3,-2.45 3,2.45, height 1.7
CRYSTAL_FC-12M_L2.05W1.2H0.6 [mm] "CRYSTAL 32.768KHZ 12.5PF SMD"
  rect 0.7x1.4 smd mask+0: 1(-0.75,0) 2(0.75,0)
  silkscreen extent -1.27,-0.89 1.27,0.89, body extent -1.03,-0.6 1.02,0.6, height 0.6
DIODE_SOT457_1P7X3P1_NEX [mil]
  rect 43.5x18 smd paste+0 mask+0: 1(-51.25,37.4) 2(-51.25,0) 3(-51.25,-37.4) 4(51.25,-37.4) 5(51.25,0) 6(51.25,37.4)
  silkscreen extent -95,-62 35,62, body extent -59,-57 59,57, height 43
DO-214AC_SMA [mm] "Molded Diode, 2-Leads, Body 5.20x2.61mm, IPC Medium Density"
  rrect30% 2.55x1.65 smd: 1(-2.05,0) 2(2.05,0)
  silkscreen extent -3.6,-1.5 2.8,1.5, body extent -2.6,-1.3 2.6,1.3, height 2.4
DS90LV011AQ-Q1 [mm]
  rrect50% 1.21x0.59 smd: 1(-1.255,0.95) 2(-1.255,0) 3(-1.255,-0.95) 4(1.255,-0.95) 5(1.255,0.95)
  silkscreen extent -1.45,-1.45 0.8,1.88, body extent -1.4,-1.45 1.4,1.45, height 1.45
Header_254P_8x1 [mm]
  rect 1.6x1.6 hole 1.1: 1(-8.89,0)
  round 1.6 hole 1.1: 2(-6.35,0) 3(-3.81,0) 4(-1.27,0) 5(1.27,0) 6(3.81,0) 7(6.35,0) 8(8.89,0)
  silkscreen extent -10.16,-1.27 10.16,1.27
HEX-M3_NoVia [mm]
  round 6 / inner round 4.4 / far side round 6 hole 3.18: 1(0,0)
IC_RV-3129-C3-32.768KHZ-OPTION-A-TB-QA [mm]
  rect 0.8x0.5 smd: 1(-1.1,1.6) 2(-1.1,0.8) 3(-1.1,0) 4(-1.1,-0.8) 5(-1.1,-1.6) 6(1.1,-1.6) 7(1.1,-0.8) 8(1.1,0) 9(1.1,0.8) 10(1.1,1.6)
  silkscreen extent -2.25,-1.85 0.38,1.85, body extent -1.25,-1.85 1.25,1.85, height 0.9
IND_C_1008 [mm]
  rect 0.9x2.4 smd mask+0.075: 1(-1,0) 2(1,0)
  silkscreen extent -0.25,-1.1 0.25,1.1, body extent -1.24,-1 1.26,1, height 1.2
JUMPER_254P_2X1_ANGLE [mm]
  rect 1.65x1.65 / inner round 1.65 / far side rect 1.65x1.65 hole 1.1: 1(-1.27,2.79)
  round 1.65 hole 1.1: 2(1.27,2.79)
  silkscreen extent -2.54,-1.27 2.54,1.27, body extent -2.54,-7.24 2.54,3.09, height 2.47
JUMPER_1608 [mil]
  round 1 smd: 1(30.51,0)
  round 1 smd paste-99999 mask+4: 2(-30,0)
  Top_1 region: -14.86,-0.09 3.75,-18.7 -38.37,-18.7 -41.57,-18.06 -44.28,-16.25 -46.1,-13.54 -46.73,-10.33 -46.73,-10.33 -46.73,10.33 -46.1,13.54 -44.28,16.25 -41.57,18.06 -38.37,18.7 -38.37,18.7 3.93,18.7
  Top_1 region: 38.88,-18.7 13.56,-18.7 -5,0 13.56,18.7 38.88,18.7 42.08,18.06 44.79,16.25 46.61,13.54 47.24,10.33 47.24,10.33 47.24,-10.33 46.61,-13.54 44.79,-16.25 42.08,-18.06 38.88,-18.7
  silkscreen extent -40,-27 41,27
M4.4 [mm]
  round 7 hole 4.4 paste-2539.97: 1(0,0)
  body extent -3,-3 3,2.99, height 6.4
MOLEX_0532610271 [mm]
  rect 0.8x1.6 smd mask+0.076: 1(-0.625,2.4) 2(0.625,2.4)
  rect 2.1x3 smd mask+0.076: M1(-3.175,-0.5) M2(3.175,-0.5)
  silkscreen extent -3.83,-2.6 3.83,3.6, body extent -3.83,-2.6 3.83,2.6, height 3.4
MOLEX_0532610471 [mm]
  rect 0.8x1.6 smd mask+0.076: 1(-1.875,2.4) 2(-0.625,2.4) 3(0.625,2.4) 4(1.875,2.4)
  rect 2.1x3 smd mask+0.076: M1(-4.425,-0.5) M2(4.425,-0.5)
  silkscreen extent -5.07,-2.6 5.07,3.4, body extent -5.07,-2.6 5.07,2.6, height 3.4
MOLEX_1051620001 [mil]
  rect 115x22 smd: 14(-84.45,146.35) 15(80.51,146.35)
  rect 41x43 smd: G1(209.65,17.02)
  rect 41x47 smd: G2(209.65,119.78) G3(-209.64,97.33)
  rect 41x94 smd: G4(-209.65,-28.06)
  rect 20x39 smd: P1(139.76,-138.49) P2(96.46,-138.49) P3(53.15,-138.49) P4(9.84,-138.49) P5(-33.46,-138.49) P6(-76.77,-138.49) P7(-120.08,-138.49) P8(-163.39,-138.49)
  rect 28x31 smd: P9(209.06,-32.98)
  silkscreen extent -228,-169 228,154, body extent -222,-485 226,150, height 59
MOLEX_5040500491 [mm]
  rect 0.6x1 smd mask+0.076: 1(2.25,-2.87) 2(0.75,-2.87) 3(-0.75,-2.87) 4(-2.25,-2.87)
  rect 1.25x1.8 smd mask+0.076: M1(4.855,2.32) M2(-4.855,2.32)
  silkscreen extent -5.28,-3.7 5.28,3.22, body extent -5.27,-3.2 5.28,3.24, height 2
MOLEX_5040500891 [mm]
  rect 0.6x1 smd mask+0.076: 1(5.25,-2.87) 2(3.75,-2.87) 3(2.25,-2.87) 4(0.75,-2.87) 5(-0.75,-2.87) 6(-2.25,-2.87) 7(-3.75,-2.87) 8(-5.25,-2.87)
  rect 1.25x1.8 smd mask+0.076: M1(7.855,2.32) M2(-7.855,2.32)
  silkscreen extent -8.27,-3.7 8.27,3.22, body extent -8.27,-3.2 8.27,3.24, height 2
MOLEX_5040500991 [mil]
  rect 26x41 smd paste+0 mask+0: 1(236.22,-119.76) 2(177.17,-119.76) 3(118.11,-119.76) 4(59.06,-119.76) 5(0,-119.76) 6(-59.06,-119.76) 7(-118.11,-119.76) 8(-177.17,-119.76) 9(-236.22,-119.76)
  rect 51x73 smd: M1(-326.97,84.57) M2(326.97,84.57)
  silkscreen extent -344,-150 344,125, body extent -355,-126 355,128, height 79
MSOP-12_MSE_LIT [mil]
  rect 52.5x17 smd paste+0 mask+0: 1(-87.25,64) 2(-87.25,38.4) 3(-87.25,12.8) 4(-87.25,-12.8) 5(-87.25,-38.4) 6(-87.25,-64) 7(87.25,-64) 8(87.25,-38.4) 9(87.25,-12.8) 10(87.25,12.8) 11(87.25,38.4) 12(87.25,64)
  rect 69x116 smd paste-57.5 mask+0: 13(0,0)
  silkscreen extent -138,-86 66,86, body extent -99,-81 99,81, height 43
QFN50P300X300X80-17N [mm]
  rrect7% 0.83x0.26 smd mask+0.04: 1(-1.47,0.75) 2(-1.47,0.25) 3(-1.47,-0.25) 4(-1.47,-0.75) 9(1.47,-0.75) 10(1.47,-0.25) 11(1.47,0.25) 12(1.47,0.75)
  rrect7% 0.26x0.83 smd mask+0.04: 5(-0.75,-1.47) 6(-0.25,-1.47) 7(0.25,-1.47) 8(0.75,-1.47) 13(0.75,1.47) 14(0.25,1.47) 15(-0.25,1.47) 16(-0.75,1.47)
  rect 1.7x1.7 smd paste-0.2 mask+0.04: 17(0,0)
  silkscreen extent -2.6,-1.58 1.58,1.58, body extent -1.5,-1.5 1.5,1.5, height 0.8
QFN-32_5X5_EP3.7X3.7 [mm] "QFN32_5MMwith ePAD"
  rrect50% 0.7x0.3 smd mask+0.04: 1(-2.5,1.75) 2(-2.5,1.25) 3(-2.5,0.75) 4(-2.5,0.25) 5(-2.5,-0.25) 6(-2.5,-0.75) 7(-2.5,-1.25) 8(-2.5,-1.75) 17(2.5,-1.75) 18(2.5,-1.25) 19(2.5,-0.75) 20(2.5,-0.25) 21(2.5,0.25) 22(2.5,0.75) 23(2.5,1.25) 24(2.5,1.75)
  rrect50% 0.3x0.7 smd mask+0.04: 9(-1.75,-2.5) 10(-1.25,-2.5) 11(-0.75,-2.5) 12(-0.25,-2.5) 13(0.25,-2.5) 14(0.75,-2.5) 15(1.25,-2.5) 16(1.75,-2.5) 25(1.75,2.5) 26(1.25,2.5) 27(0.75,2.5) 28(0.25,2.5) 29(-0.25,2.5) 30(-0.75,2.5) 31(-1.25,2.5) 32(-1.75,2.5)
  rect 3.7x3.7 smd mask+0.05: 33(0,0)
  silkscreen extent -2.65,-2.65 2.65,2.68, body extent -2.56,-2.56 2.56,2.56, height 1.01
RES_C_0603X30 [mm] "Chip Resistor, 2-Leads, Body 0.6x0.3mm, IPC Medium Density"
  rrect50% 0.275x0.3 smd mask+0.05: 1(-0.262,0) 2(0.262,0)
  body extent -0.3,-0.15 0.3,0.15, height 0.22
RES_C_1005x30_L [mm] "Chip Resistor, 2-Leads, Body 1.0x0.5mm, IPC Medium Density"
  rrect50% 0.55x0.6 smd mask+0.05: 1(-0.45,0) 2(0.45,0)
  body extent -0.5,-0.3 0.5,0.3, height 0.2
RES_C_1206_SHUNT [mm] "Chip Resistor, 2-Leads, Body 3.2x1.6mm, IPC Medium Density"
  rect 1x0.5 smd mask+0.1: 1(-1.5,0.6) 1(-1.5,-0.6) 2(1.5,0.6) 2(1.5,-0.6)
  rect 1x0.35 smd mask+0.1: 3(-1.5,0) 4(1.5,0)
  silkscreen extent -0.6,-0.77 0.6,0.78, body extent -1.6,-0.8 1.6,0.8, height 1
SAMTEC-TLE-110-01-X-DV-A [mm]
  rect 1.12x2.11 smd mask+0: 1(-9,-2.222) 2(-9,2.222) 3(-7,-2.222) 4(-7,2.222) 5(-5,-2.222) 6(-5,2.222) 7(-3,-2.222) 8(-3,2.222) 9(-1,-2.222) 10(-1,2.222) 11(1,-2.222) 12(1,2.222) 13(3,-2.222) 14(3,2.222) 15(5,-2.222) 16(5,2.222) 17(7,-2.222) 18(7,2.222) 19(9,-2.222) 20(9,2.222)
  round 0.76 hole 0.76 unplated: ""(-8,0) ""(8,0)
  silkscreen extent -10.45,-4.44 10.45,3.73, body extent -9.99,-2.78 9.99,2.78, height 4.32